# Altium PCB Receiver.PcbDoc (part 1 of 4)
Units mil, origin at the board's own origin, x right, y up, seen from the top; angles counter-clockwise.
Board outline 6370 x 5700 mil, 4 copper layers (Top Layer, GND, VCC, Bottom Layer), stack 23.756 mil thick; 303 components, 262 nets, 1184 pads, 312 vias.
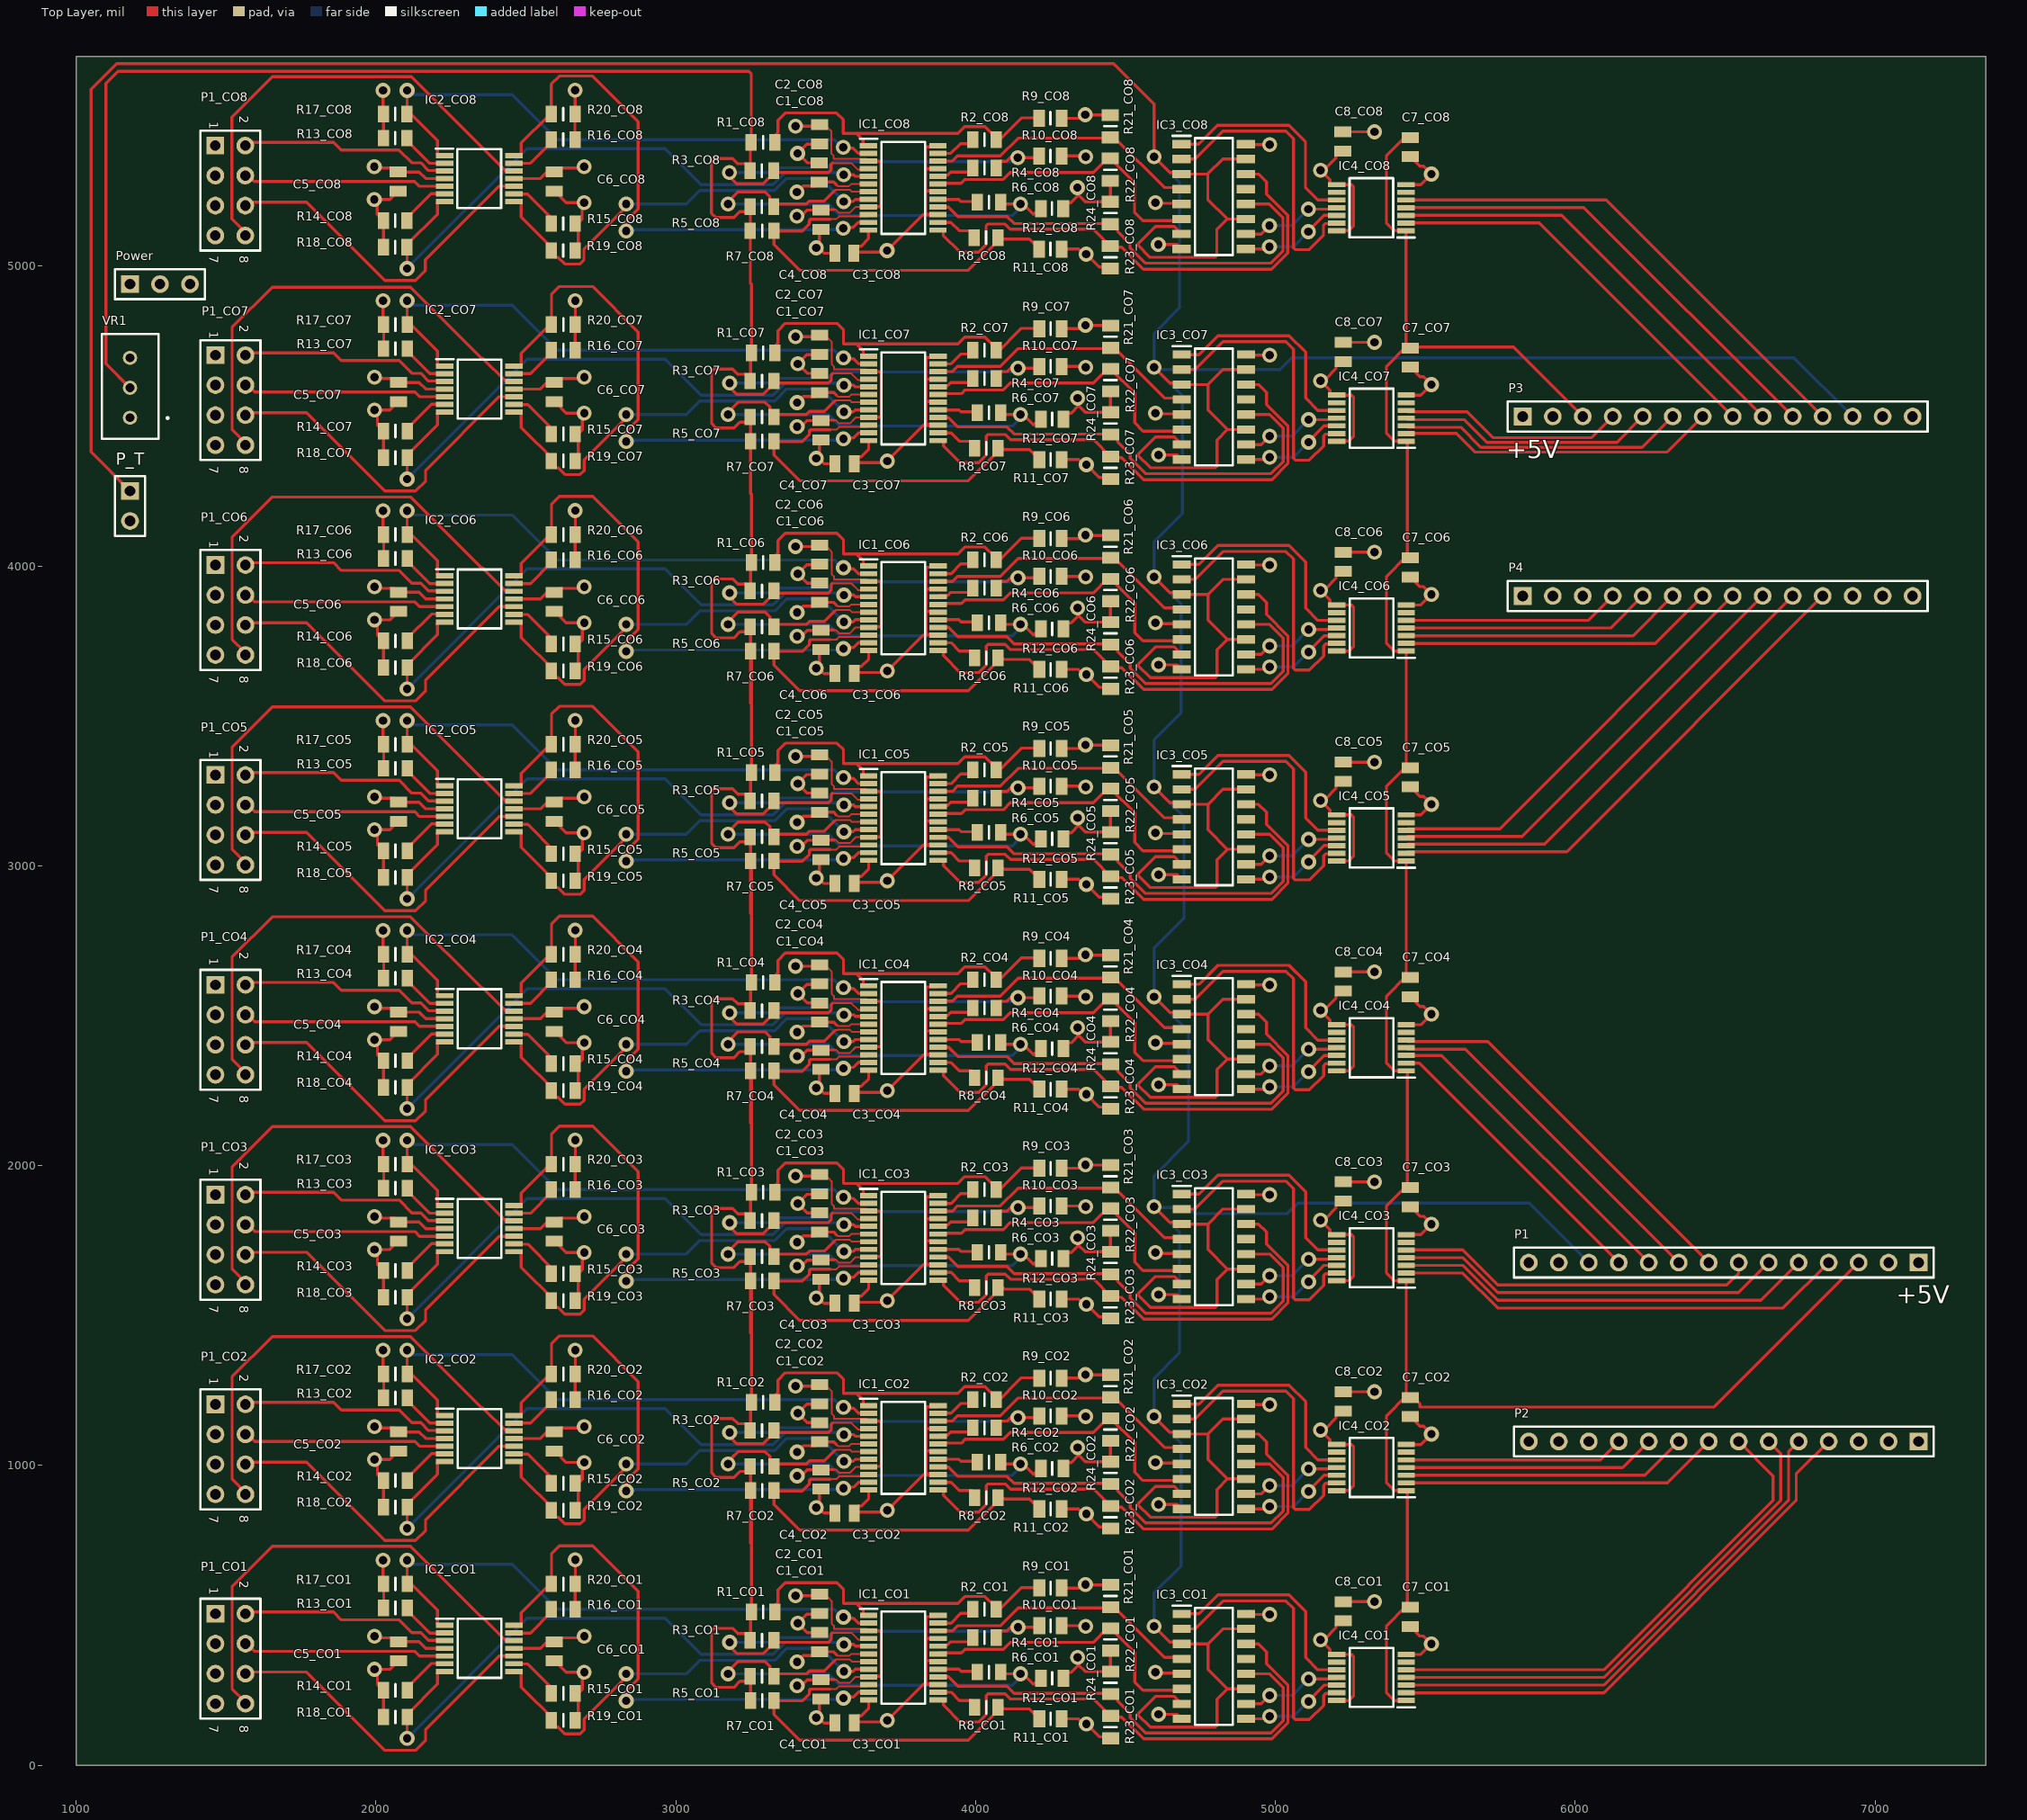
[diagram p0: Top Layer view]
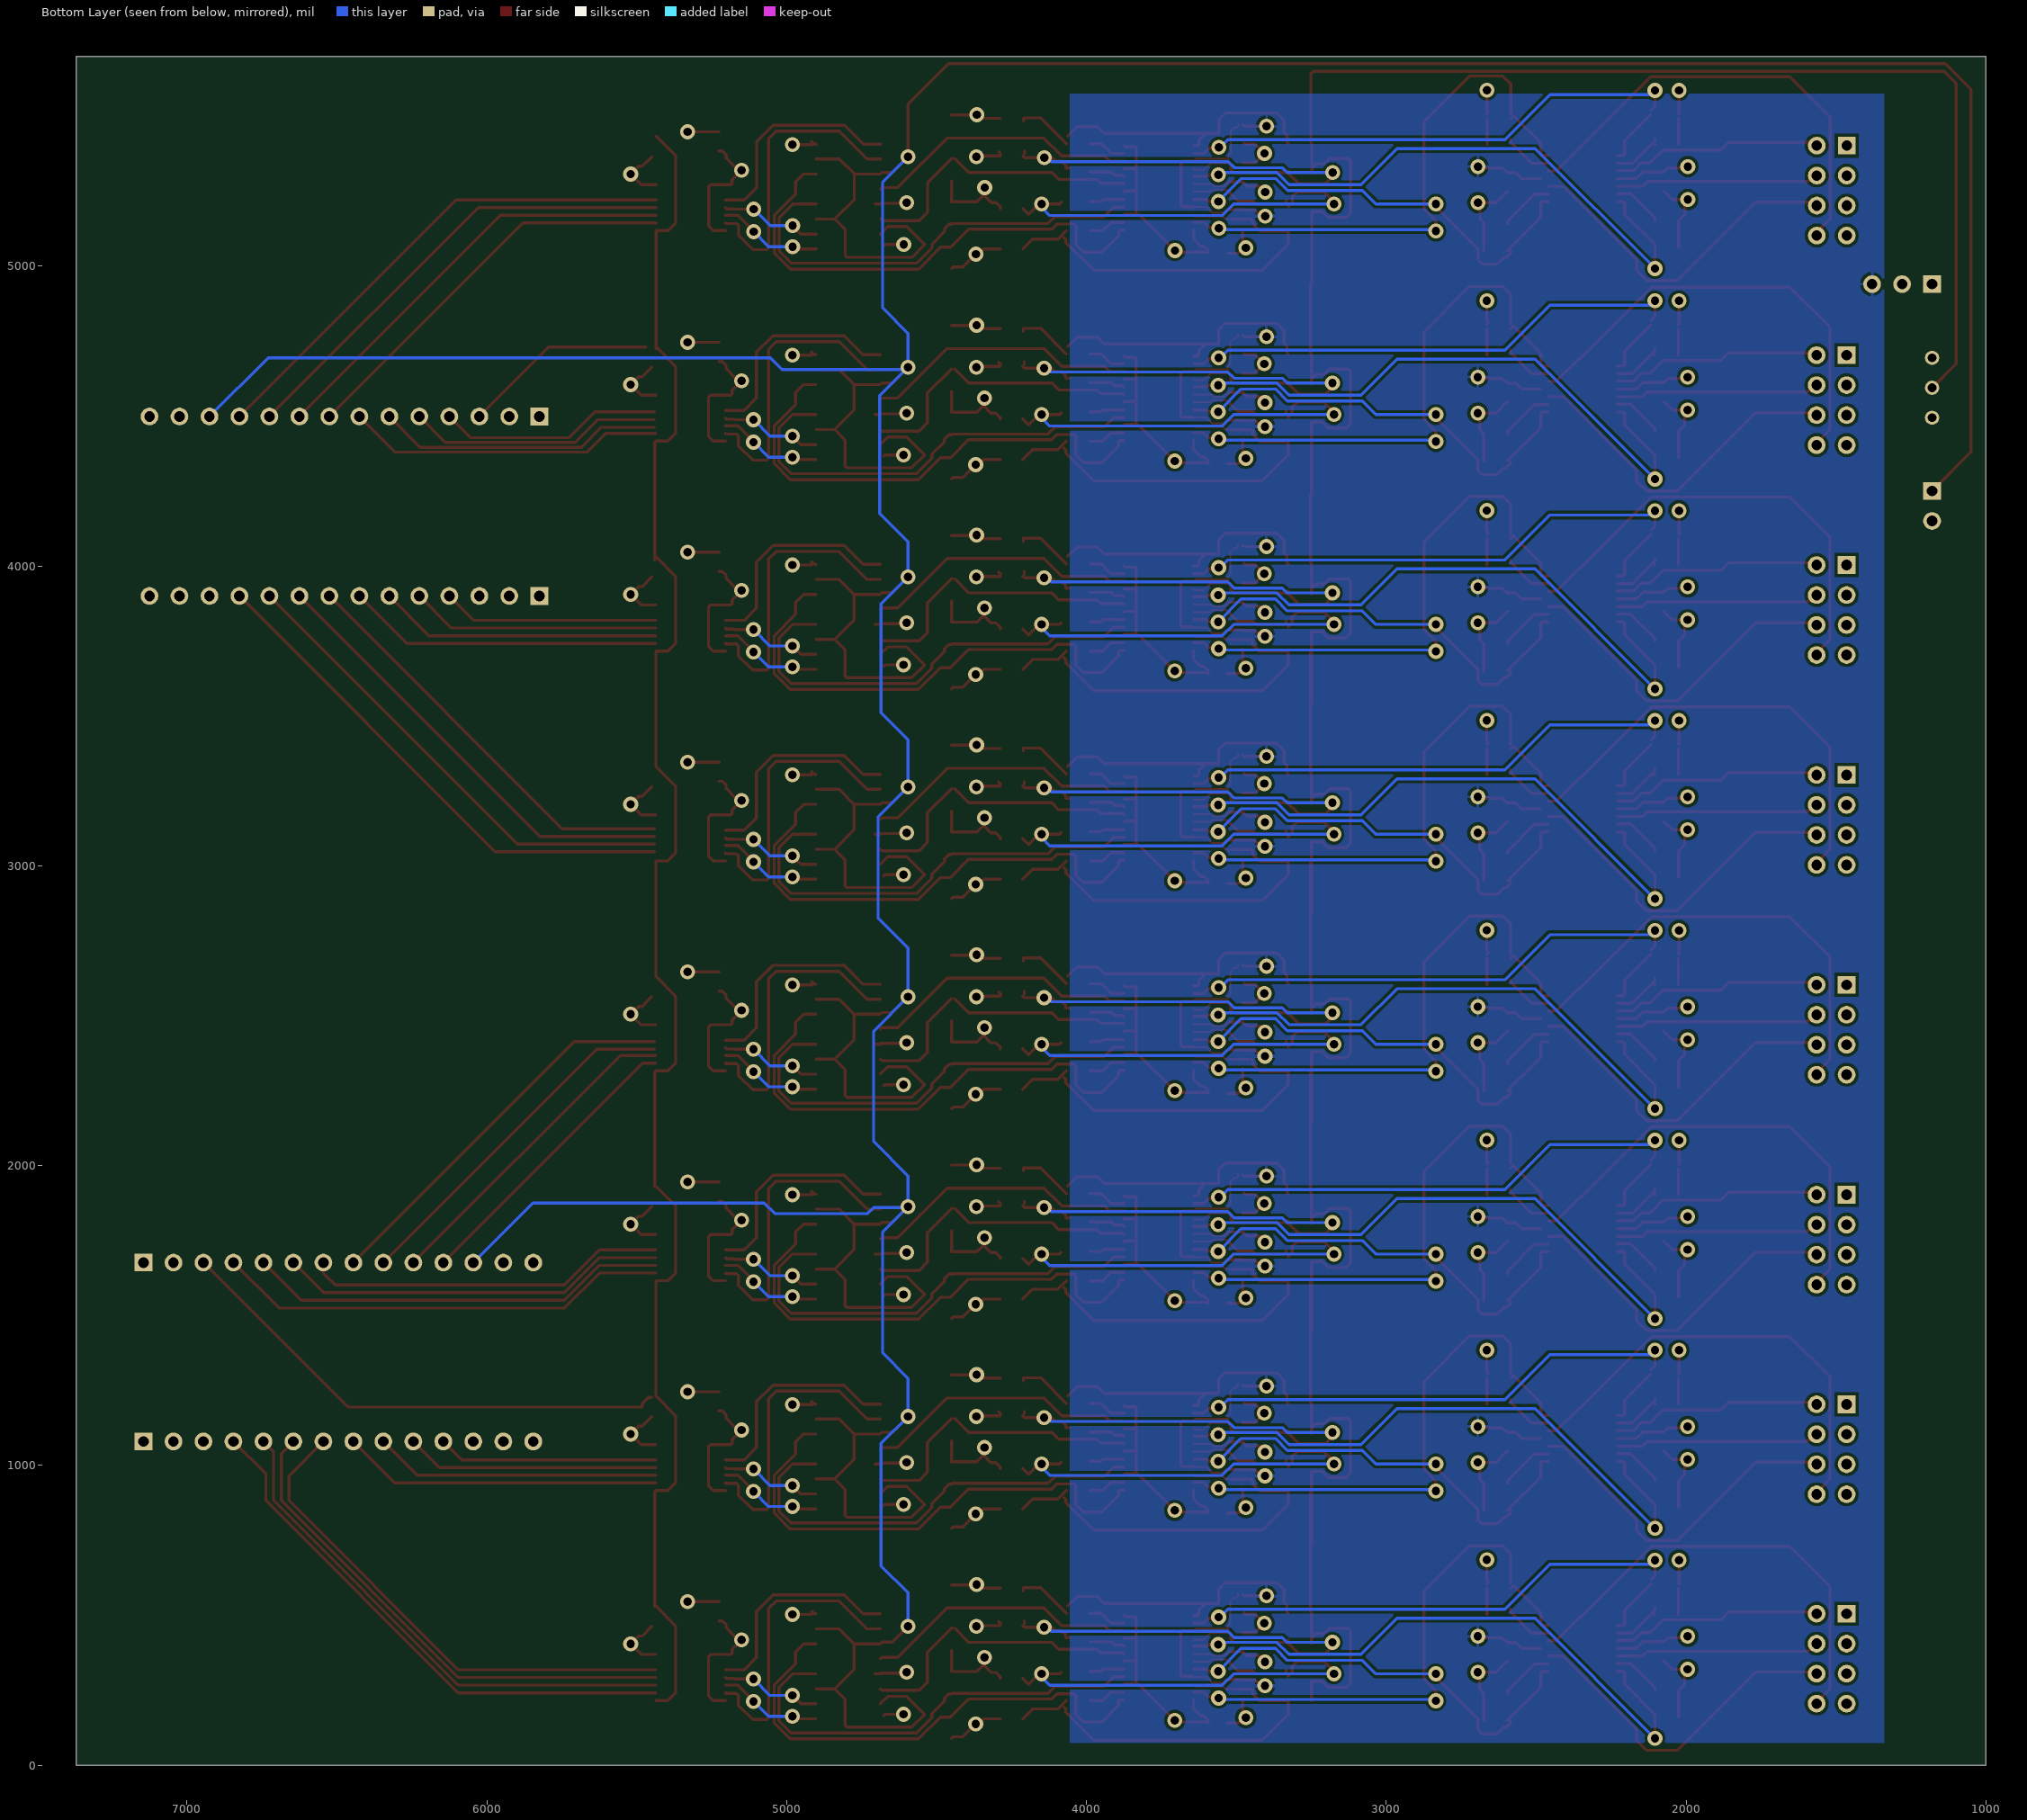
[diagram p1: Bottom Layer view, seen from below]
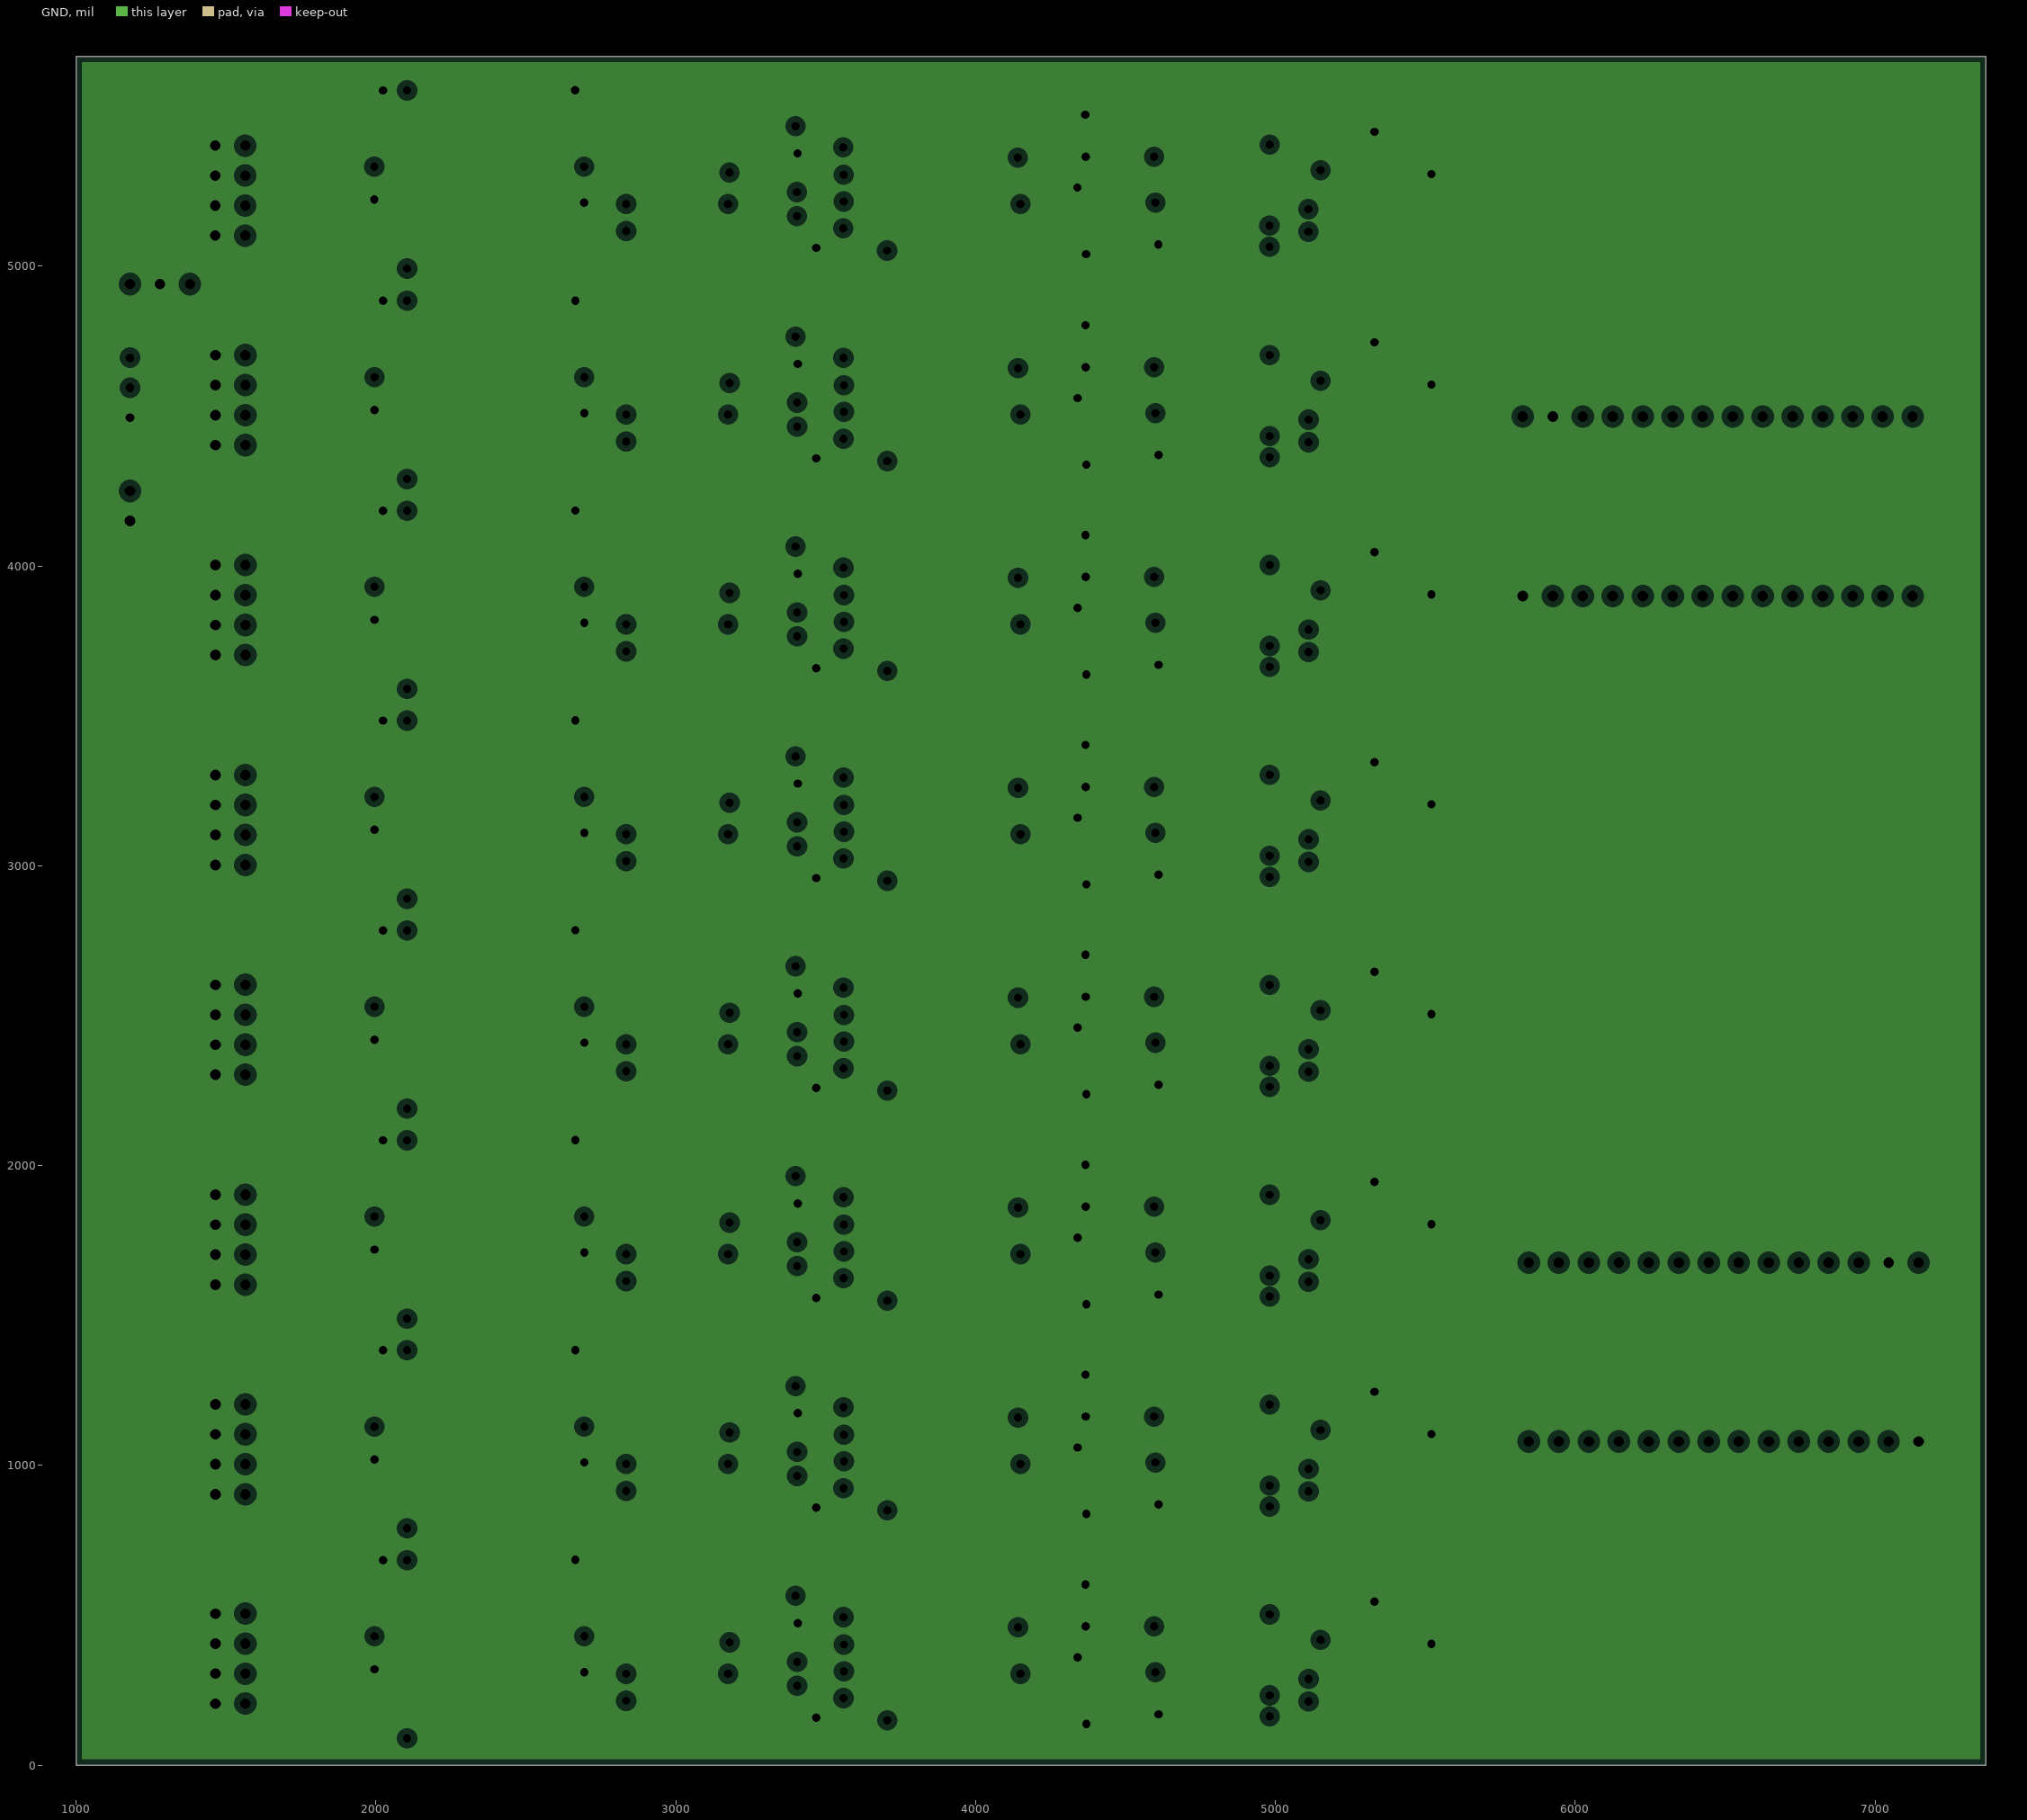
[diagram p2: GND, clearances drawn from the general rule]
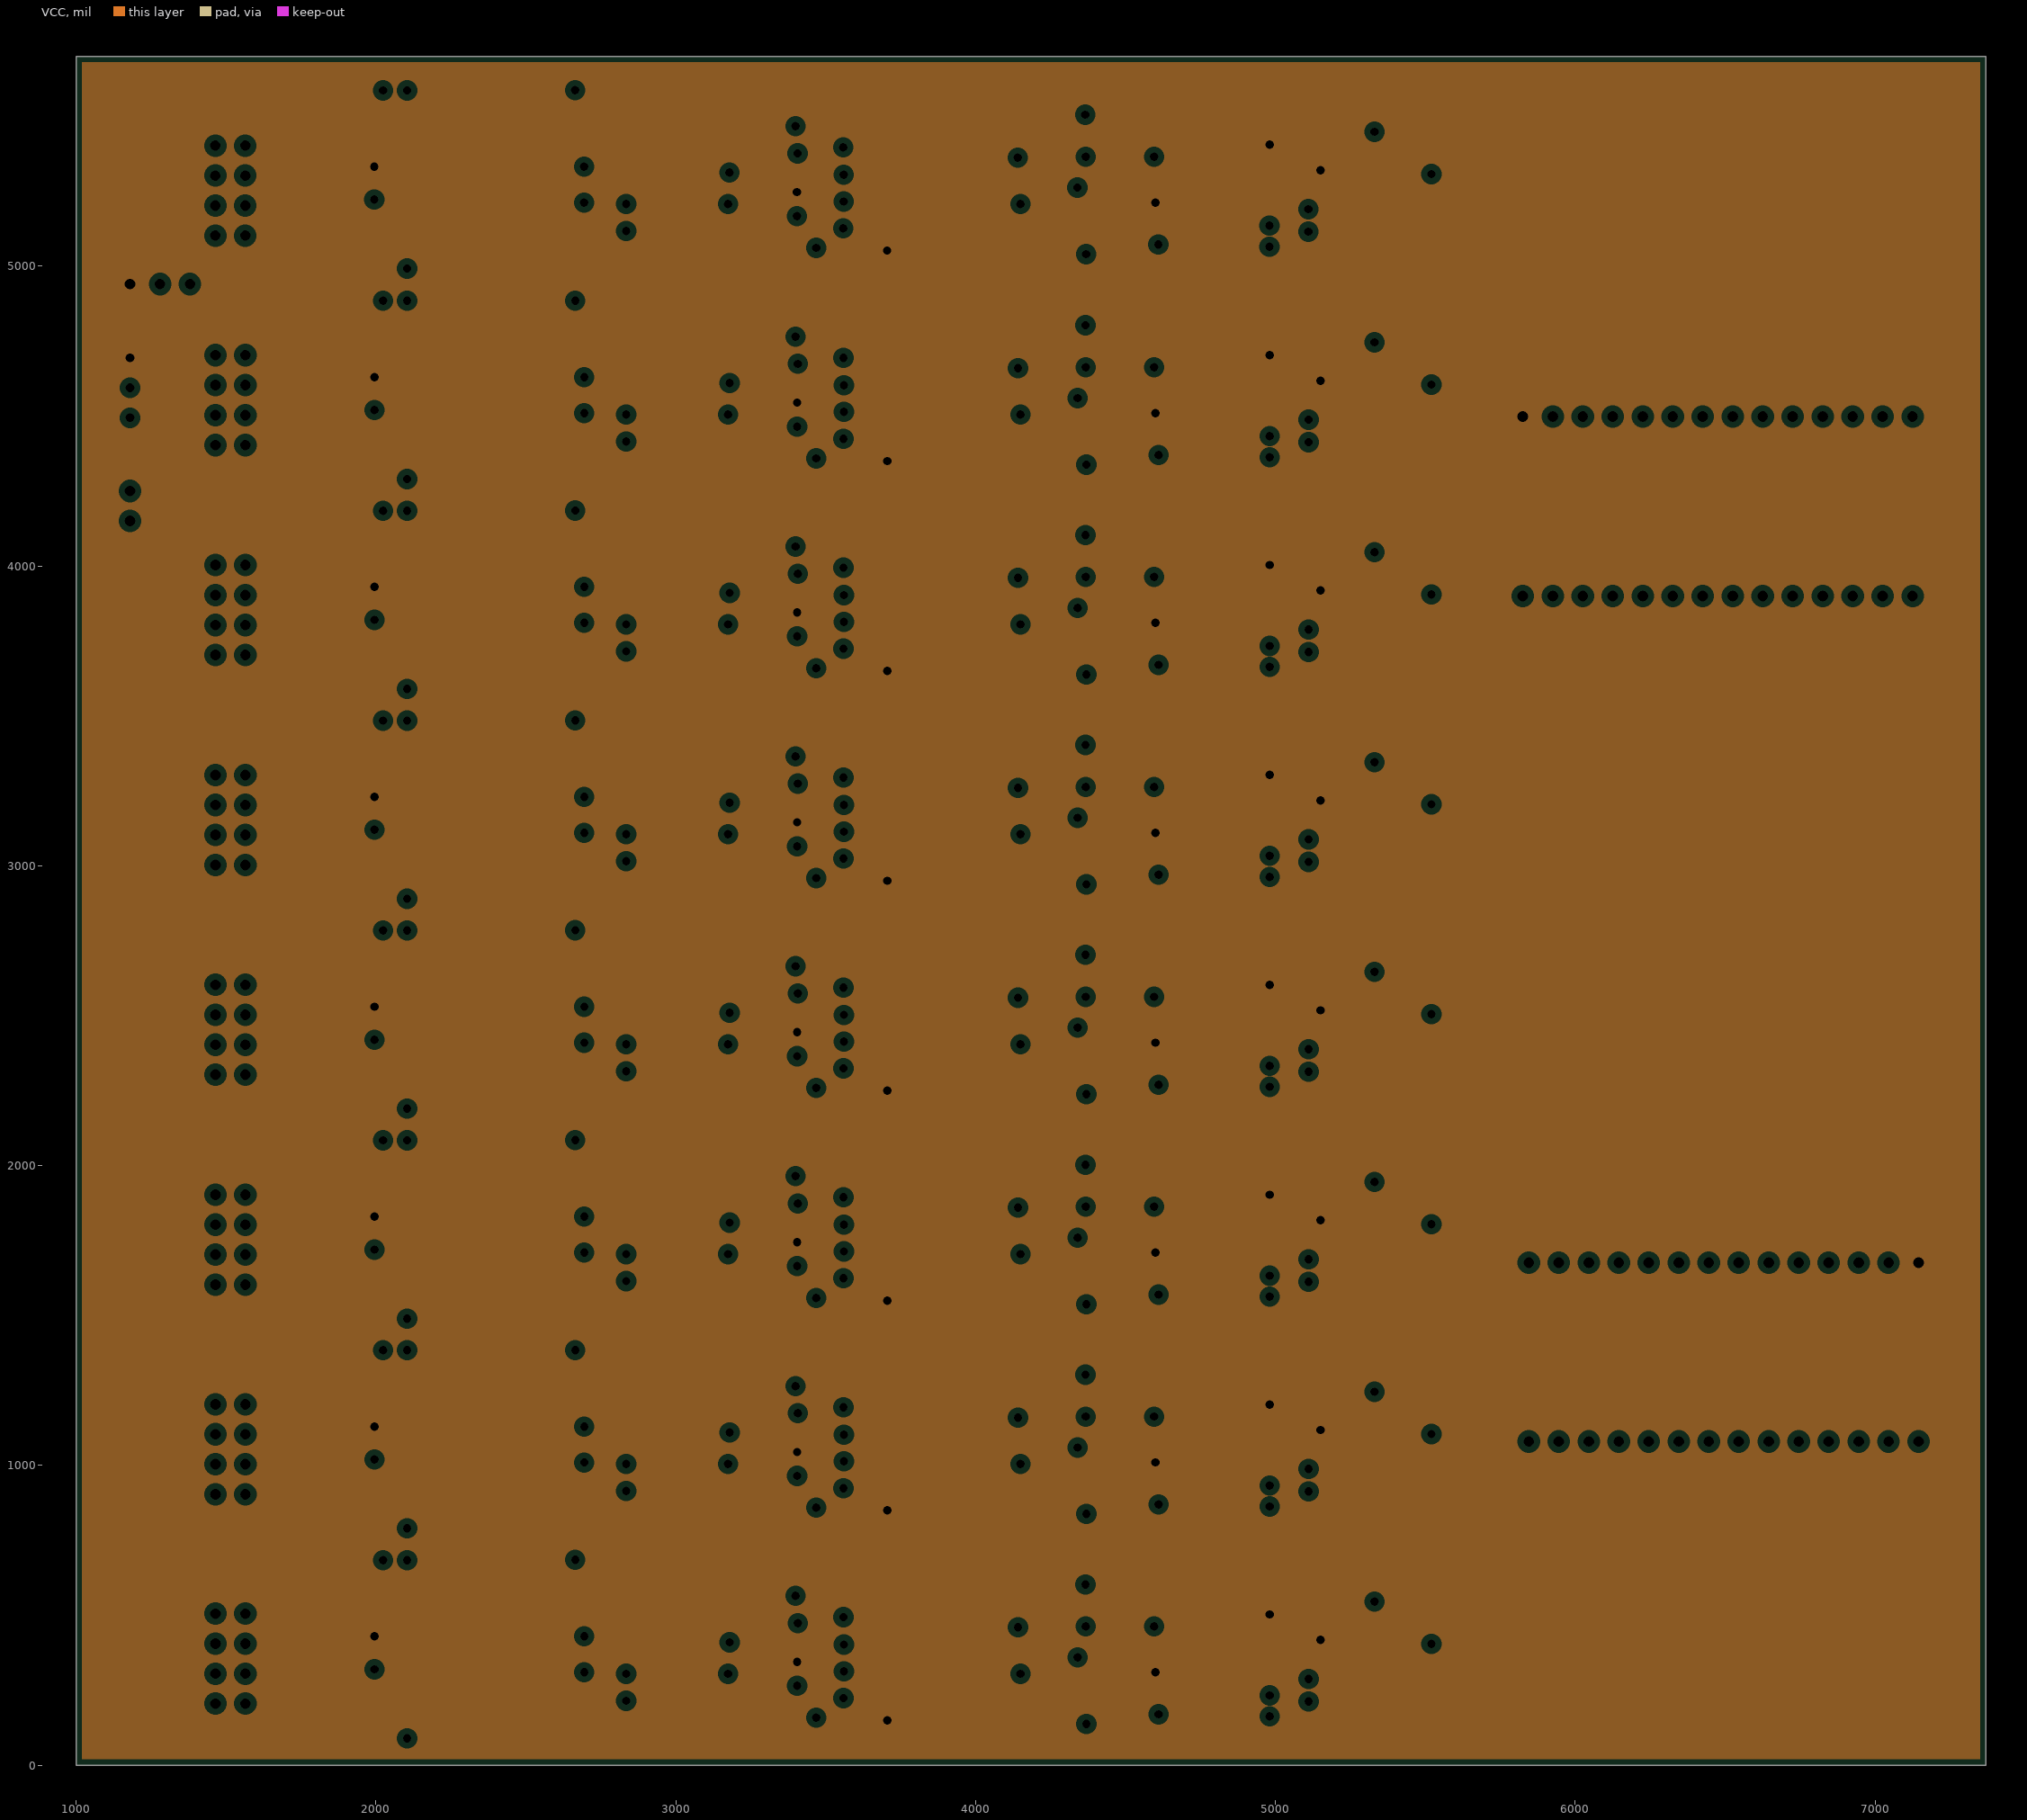
[diagram p3: VCC, clearances drawn from the general rule]
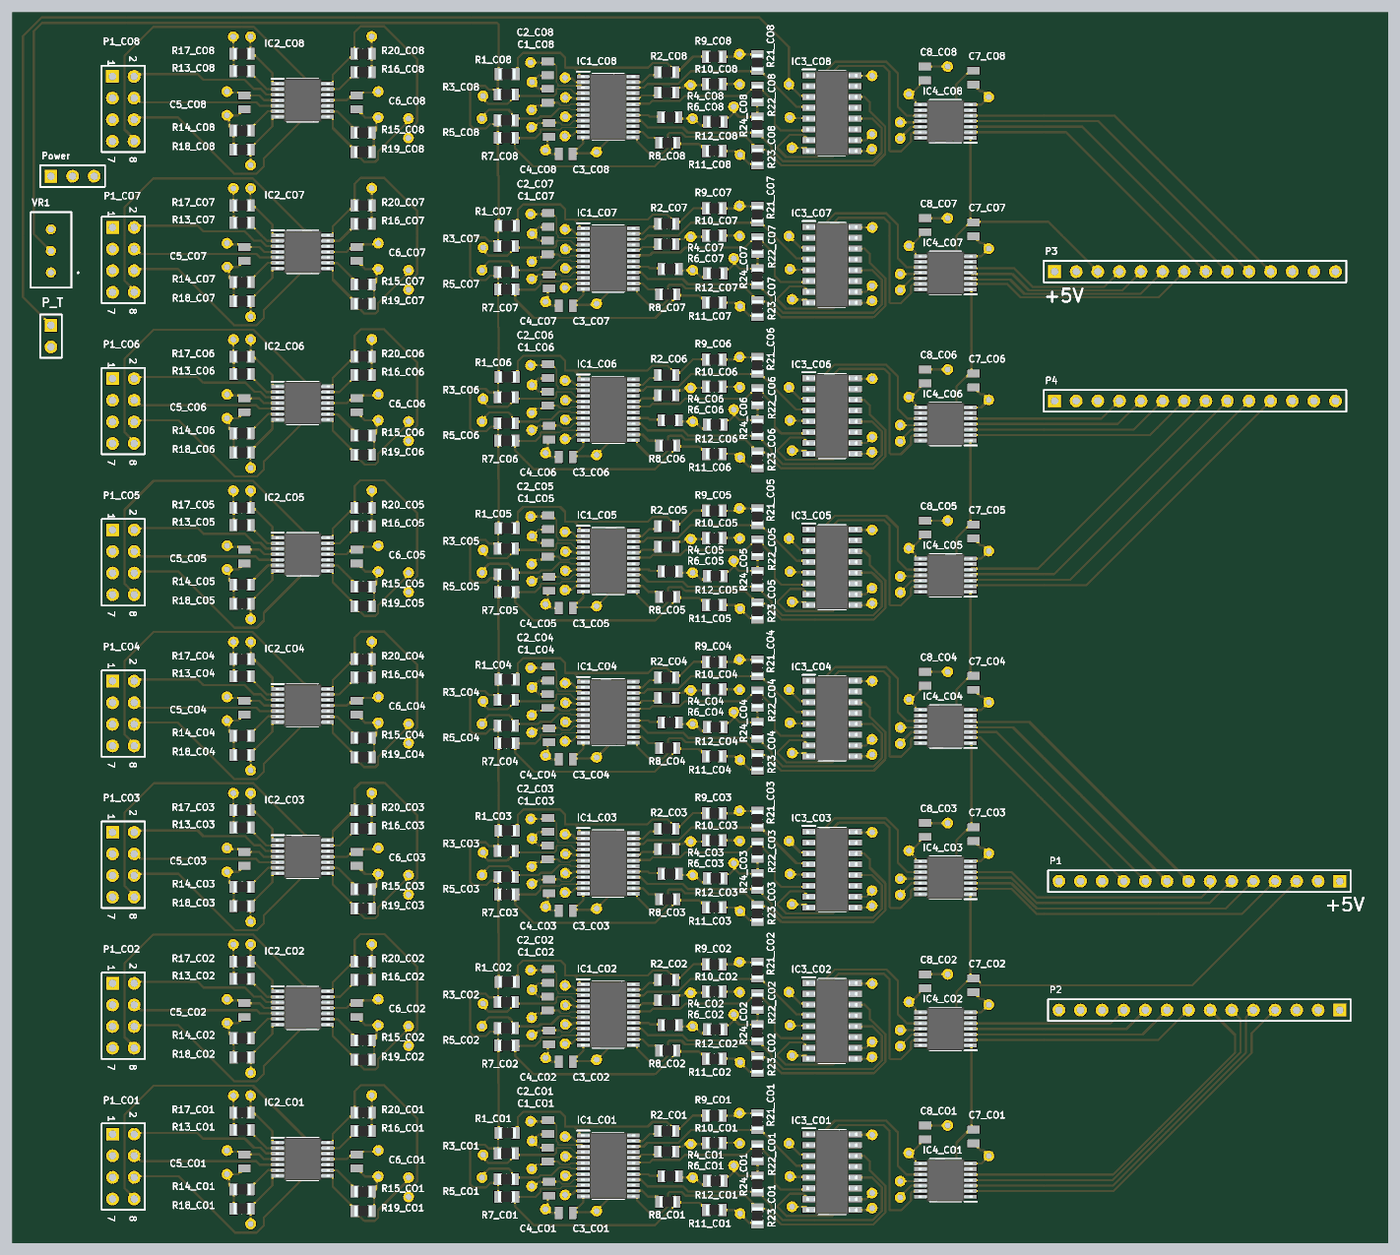
[diagram p7: 3D render of the assembled board from above, using the file's embedded part models]

## Layer stack, top to bottom
Top Solder: solder mask 0.4, Solder Resist, Dk 3.5
Top Layer: signal copper 1.4
Dielectric 2: prepreg 2.8, PP-006, Dk 4.1
GND: plane copper 1.3779, net GND
Dielectric 1: dielectric 12.6, FR-4, Dk 4.8
VCC: plane copper 1.3779, net +5
Dielectric 3: prepreg 2.8, PP-006, Dk 4.1
Bottom Layer: signal copper 1.4
Bottom Solder: solder mask 0.4, Solder Resist, Dk 3.5

## Board outline
1000,0 7370,0 7370,5700 1000,5700

## Design rules (kind name [scope] priority, off if disabled: settings)
Clearance [All] p1: gap=10 ignorepadtopadclearanceinfootprint=FALSE except(0: Arc-Hole Track-Hole SMDPad-Hole THPad-Hole Via-Hole Fill-Hole Poly-Hole Region-Hole Text-Hole; 6: Arc-Arc Arc-Track Arc-SMDPad Track-Track Track-SMDPad SMDPad-SMDPad)
PlaneClearance [All] p1: clearance=20
PlaneConnect [All] p1: planeconnectstyle=Relief reliefexpansion=20 reliefentries=4 reliefconductorwidth=10 reliefairgap=10
PolygonConnect [All] p1: connectstyle=Relief reliefconductorwidth=10 reliefentries=4 polygonreliefangle="90 Angle" airgapwidth=10
RoomDefinition CO8 [InComponentClass('CO8')] p1: confinementstyle=ConfineIn formatcopy=TRUE lockcomponents=FALSE outline 1339.57,4941.97 5610,4941.97 5610,5641.97 1339.57,5641.97
RoomDefinition CO6 [InComponentClass('CO6')] p2: confinementstyle=ConfineIn formatcopy=TRUE lockcomponents=FALSE outline 1340,3540 5610.43,3540 5610.43,4240 1340,4240
RoomDefinition CO5 [InComponentClass('CO5')] p3: confinementstyle=ConfineIn formatcopy=TRUE lockcomponents=FALSE outline 1340,2840 5610.43,2840 5610.43,3540 1340,3540
RoomDefinition CO4 [InComponentClass('CO4')] p4: confinementstyle=ConfineIn formatcopy=TRUE lockcomponents=FALSE outline 1340,2140 5610.43,2140 5610.43,2840 1340,2840
RoomDefinition CO3 [InComponentClass('CO3')] p5: confinementstyle=ConfineIn formatcopy=TRUE lockcomponents=FALSE outline 1340,1440 5610.43,1440 5610.43,2140 1340,2140
RoomDefinition CO2 [InComponentClass('CO2')] p6: confinementstyle=ConfineIn formatcopy=TRUE lockcomponents=FALSE outline 1340,740 5610.43,740 5610.43,1440 1340,1440
RoomDefinition CO1 [InComponentClass('CO1')] p7: confinementstyle=ConfineIn formatcopy=TRUE lockcomponents=FALSE outline 1340,40 5610.43,40 5610.43,740 1340,740
RoomDefinition CO7 [InComponentClass('CO7')] p8: confinementstyle=ConfineIn formatcopy=TRUE lockcomponents=FALSE outline 1340,4240 5610.43,4240 5610.43,4940 1340,4940
RoutingVias [All] p1: holewidth=28 width=50 viastyle="Through Hole" minholewidth=28 minwidth=50 maxholewidth=28 maxwidth=50
SilkToSolderMaskClearance [IsPad] p1: minsilkscreentomaskgap=6 clearancetoexposedcopper=TRUE
SolderMaskExpansion [All] p1: expansion=4
Width [All] p1: maxlimit=10 minlimit=6 preferedwidth=10 minimp=50.000000 maximp=50.000000 favimp=50.000000
27 further rules are at their usual default settings.

## Classes and differential pairs
channel class Comparator: CO1 CO2 CO3 CO4 CO5 CO6 CO7 CO8
component class Receiver: P1 P2 P3 P4 P_T Power VR1
component class CO8: C1_CO8 C2_CO8 C3_CO8 C4_CO8 C5_CO8 C6_CO8 C7_CO8 C8_CO8 IC1_CO8 IC2_CO8 IC3_CO8 IC4_CO8 P1_CO8 R1_CO8 R2_CO8 R3_CO8 R4_CO8 R5_CO8 R6_CO8 R7_CO8 R8_CO8 R9_CO8 R10_CO8 R11_CO8 R12_CO8 R13_CO8 R14_CO8 R15_CO8 R16_CO8 R17_CO8 R18_CO8 R19_CO8 R20_CO8 R21_CO8 R22_CO8 R23_CO8 R24_CO8
component class CO7: C1_CO7 C2_CO7 C3_CO7 C4_CO7 C5_CO7 C6_CO7 C7_CO7 C8_CO7 IC1_CO7 IC2_CO7 IC3_CO7 IC4_CO7 P1_CO7 R1_CO7 R2_CO7 R3_CO7 R4_CO7 R5_CO7 R6_CO7 R7_CO7 R8_CO7 R9_CO7 R10_CO7 R11_CO7 R12_CO7 R13_CO7 R14_CO7 R15_CO7 R16_CO7 R17_CO7 R18_CO7 R19_CO7 R20_CO7 R21_CO7 R22_CO7 R23_CO7 R24_CO7
component class CO6: C1_CO6 C2_CO6 C3_CO6 C4_CO6 C5_CO6 C6_CO6 C7_CO6 C8_CO6 IC1_CO6 IC2_CO6 IC3_CO6 IC4_CO6 P1_CO6 R1_CO6 R2_CO6 R3_CO6 R4_CO6 R5_CO6 R6_CO6 R7_CO6 R8_CO6 R9_CO6 R10_CO6 R11_CO6 R12_CO6 R13_CO6 R14_CO6 R15_CO6 R16_CO6 R17_CO6 R18_CO6 R19_CO6 R20_CO6 R21_CO6 R22_CO6 R23_CO6 R24_CO6
component class CO5: C1_CO5 C2_CO5 C3_CO5 C4_CO5 C5_CO5 C6_CO5 C7_CO5 C8_CO5 IC1_CO5 IC2_CO5 IC3_CO5 IC4_CO5 P1_CO5 R1_CO5 R2_CO5 R3_CO5 R4_CO5 R5_CO5 R6_CO5 R7_CO5 R8_CO5 R9_CO5 R10_CO5 R11_CO5 R12_CO5 R13_CO5 R14_CO5 R15_CO5 R16_CO5 R17_CO5 R18_CO5 R19_CO5 R20_CO5 R21_CO5 R22_CO5 R23_CO5 R24_CO5
component class CO4: C1_CO4 C2_CO4 C3_CO4 C4_CO4 C5_CO4 C6_CO4 C7_CO4 C8_CO4 IC1_CO4 IC2_CO4 IC3_CO4 IC4_CO4 P1_CO4 R1_CO4 R2_CO4 R3_CO4 R4_CO4 R5_CO4 R6_CO4 R7_CO4 R8_CO4 R9_CO4 R10_CO4 R11_CO4 R12_CO4 R13_CO4 R14_CO4 R15_CO4 R16_CO4 R17_CO4 R18_CO4 R19_CO4 R20_CO4 R21_CO4 R22_CO4 R23_CO4 R24_CO4
component class CO3: C1_CO3 C2_CO3 C3_CO3 C4_CO3 C5_CO3 C6_CO3 C7_CO3 C8_CO3 IC1_CO3 IC2_CO3 IC3_CO3 IC4_CO3 P1_CO3 R1_CO3 R2_CO3 R3_CO3 R4_CO3 R5_CO3 R6_CO3 R7_CO3 R8_CO3 R9_CO3 R10_CO3 R11_CO3 R12_CO3 R13_CO3 R14_CO3 R15_CO3 R16_CO3 R17_CO3 R18_CO3 R19_CO3 R20_CO3 R21_CO3 R22_CO3 R23_CO3 R24_CO3
component class CO2: C1_CO2 C2_CO2 C3_CO2 C4_CO2 C5_CO2 C6_CO2 C7_CO2 C8_CO2 IC1_CO2 IC2_CO2 IC3_CO2 IC4_CO2 P1_CO2 R1_CO2 R2_CO2 R3_CO2 R4_CO2 R5_CO2 R6_CO2 R7_CO2 R8_CO2 R9_CO2 R10_CO2 R11_CO2 R12_CO2 R13_CO2 R14_CO2 R15_CO2 R16_CO2 R17_CO2 R18_CO2 R19_CO2 R20_CO2 R21_CO2 R22_CO2 R23_CO2 R24_CO2
component class CO1: C1_CO1 C2_CO1 C3_CO1 C4_CO1 C5_CO1 C6_CO1 C7_CO1 C8_CO1 IC1_CO1 IC2_CO1 IC3_CO1 IC4_CO1 P1_CO1 R1_CO1 R2_CO1 R3_CO1 R4_CO1 R5_CO1 R6_CO1 R7_CO1 R8_CO1 R9_CO1 R10_CO1 R11_CO1 R12_CO1 R13_CO1 R14_CO1 R15_CO1 R16_CO1 R17_CO1 R18_CO1 R19_CO1 R20_CO1 R21_CO1 R22_CO1 R23_CO1 R24_CO1

## Components (designator, comment, footprint, x,y, rotation, side; value= is the part's Value field where it differs from the comment)
C1_CO1 "CC0805ZRY5V9BB104" CAPC2013X70N 3479.2,410.57 r270 top (schematic designator C1)
C1_CO2 "CC0805ZRY5V9BB104" CAPC2013X70N 3479.2,1110.57 r270 top (schematic designator C1)
C1_CO3 "CC0805ZRY5V9BB104" CAPC2013X70N 3479.2,1810.57 r270 top (schematic designator C1)
C1_CO4 "CC0805ZRY5V9BB104" CAPC2013X70N 3479.2,2510.57 r270 top (schematic designator C1)
C1_CO5 "CC0805ZRY5V9BB104" CAPC2013X70N 3479.2,3210.57 r270 top (schematic designator C1)
C1_CO6 "CC0805ZRY5V9BB104" CAPC2013X70N 3479.2,3910.57 r270 top (schematic designator C1)
C1_CO7 "CC0805ZRY5V9BB104" CAPC2013X70N 3479.2,4610.57 r270 top (schematic designator C1)
C1_CO8 "CC0805ZRY5V9BB104" CAPC2013X70N 3478.77,5312.54 r270 top (schematic designator C1)
C2_CO1 "CC0805ZRY5V9BB104" CAPC2013X70N 3480,538 r90 top (schematic designator C2)
C2_CO2 "CC0805ZRY5V9BB104" CAPC2013X70N 3480,1238 r90 top (schematic designator C2)
C2_CO3 "CC0805ZRY5V9BB104" CAPC2013X70N 3480,1938 r90 top (schematic designator C2)
C2_CO4 "CC0805ZRY5V9BB104" CAPC2013X70N 3480,2638 r90 top (schematic designator C2)
C2_CO5 "CC0805ZRY5V9BB104" CAPC2013X70N 3480,3338 r90 top (schematic designator C2)
C2_CO6 "CC0805ZRY5V9BB104" CAPC2013X70N 3480,4038 r90 top (schematic designator C2)
C2_CO7 "CC0805ZRY5V9BB104" CAPC2013X70N 3480,4738 r90 top (schematic designator C2)
C2_CO8 "CC0805ZRY5V9BB104" CAPC2013X70N 3479.57,5439.97 r90 top (schematic designator C2)
C3_CO1 "CC0805ZRY5V9BB104" CAPC2013X70N 3562.87,140.99 r0 top (schematic designator C3)
C3_CO2 "CC0805ZRY5V9BB104" CAPC2013X70N 3562.87,840.99 r0 top (schematic designator C3)
C3_CO3 "CC0805ZRY5V9BB104" CAPC2013X70N 3562.87,1540.99 r0 top (schematic designator C3)
C3_CO4 "CC0805ZRY5V9BB104" CAPC2013X70N 3562.87,2240.99 r0 top (schematic designator C3)
C3_CO5 "CC0805ZRY5V9BB104" CAPC2013X70N 3562.87,2940.99 r0 top (schematic designator C3)
C3_CO6 "CC0805ZRY5V9BB104" CAPC2013X70N 3562.87,3640.99 r0 top (schematic designator C3)
C3_CO7 "CC0805ZRY5V9BB104" CAPC2013X70N 3562.87,4340.99 r0 top (schematic designator C3)
C3_CO8 "CC0805ZRY5V9BB104" CAPC2013X70N 3562.44,5042.96 r0 top (schematic designator C3)
C4_CO1 "CC0805ZRY5V9BB104" CAPC2013X70N 3485,253 r90 top (schematic designator C4)
C4_CO2 "CC0805ZRY5V9BB104" CAPC2013X70N 3485,953 r90 top (schematic designator C4)
C4_CO3 "CC0805ZRY5V9BB104" CAPC2013X70N 3485,1653 r90 top (schematic designator C4)
C4_CO4 "CC0805ZRY5V9BB104" CAPC2013X70N 3485,2353 r90 top (schematic designator C4)
C4_CO5 "CC0805ZRY5V9BB104" CAPC2013X70N 3485,3053 r90 top (schematic designator C4)
C4_CO6 "CC0805ZRY5V9BB104" CAPC2013X70N 3485,3753 r90 top (schematic designator C4)
C4_CO7 "CC0805ZRY5V9BB104" CAPC2013X70N 3485,4453 r90 top (schematic designator C4)
C4_CO8 "CC0805ZRY5V9BB104" CAPC2013X70N 3484.57,5154.97 r90 top (schematic designator C4)
C5_CO1 "CC0805ZRY5V9BB104" CAPC2013X70N 2075,380 r270 top (schematic designator C5)
C5_CO2 "CC0805ZRY5V9BB104" CAPC2013X70N 2075,1080 r270 top (schematic designator C5)
C5_CO3 "CC0805ZRY5V9BB104" CAPC2013X70N 2075,1780 r270 top (schematic designator C5)
C5_CO4 "CC0805ZRY5V9BB104" CAPC2013X70N 2075,2480 r270 top (schematic designator C5)
C5_CO5 "CC0805ZRY5V9BB104" CAPC2013X70N 2075,3180 r270 top (schematic designator C5)
C5_CO6 "CC0805ZRY5V9BB104" CAPC2013X70N 2075,3880 r270 top (schematic designator C5)
C5_CO7 "CC0805ZRY5V9BB104" CAPC2013X70N 2075,4580 r270 top (schematic designator C5)
C5_CO8 "CC0805ZRY5V9BB104" CAPC2013X70N 2074.57,5281.97 r270 top (schematic designator C5)
C6_CO1 "CC0805ZRY5V9BB104" CAPC2013X70N 2595,380 r270 top (schematic designator C6)
C6_CO2 "CC0805ZRY5V9BB104" CAPC2013X70N 2595,1080 r270 top (schematic designator C6)
C6_CO3 "CC0805ZRY5V9BB104" CAPC2013X70N 2595,1780 r270 top (schematic designator C6)
C6_CO4 "CC0805ZRY5V9BB104" CAPC2013X70N 2595,2480 r270 top (schematic designator C6)
C6_CO5 "CC0805ZRY5V9BB104" CAPC2013X70N 2595,3180 r270 top (schematic designator C6)
C6_CO6 "CC0805ZRY5V9BB104" CAPC2013X70N 2595,3880 r270 top (schematic designator C6)
C6_CO7 "CC0805ZRY5V9BB104" CAPC2013X70N 2595,4580 r270 top (schematic designator C6)
C6_CO8 "CC0805ZRY5V9BB104" CAPC2013X70N 2594.57,5281.97 r270 top (schematic designator C6)
C7_CO1 "CC0805ZRY5V9BB104" CAPC2013X70N 5450,495.03 r270 top (schematic designator C7)
C7_CO2 "CC0805ZRY5V9BB104" CAPC2013X70N 5450,1195.03 r270 top (schematic designator C7)
C7_CO3 "CC0805ZRY5V9BB104" CAPC2013X70N 5450,1895.03 r270 top (schematic designator C7)
C7_CO4 "CC0805ZRY5V9BB104" CAPC2013X70N 5450,2595.03 r270 top (schematic designator C7)
C7_CO5 "CC0805ZRY5V9BB104" CAPC2013X70N 5450,3295.03 r270 top (schematic designator C7)
C7_CO6 "CC0805ZRY5V9BB104" CAPC2013X70N 5450,3995.03 r270 top (schematic designator C7)
C7_CO7 "CC0805ZRY5V9BB104" CAPC2013X70N 5450,4695.03 r270 top (schematic designator C7)
C7_CO8 "CC0805ZRY5V9BB104" CAPC2013X70N 5449.57,5397 r270 top (schematic designator C7)
C8_CO1 "a" CAPC2013X70N 5225.43,513.78 r90 top (schematic designator C8)
C8_CO2 "a" CAPC2013X70N 5225.43,1213.78 r90 top (schematic designator C8)
C8_CO3 "a" CAPC2013X70N 5225.43,1913.78 r90 top (schematic designator C8)
C8_CO4 "a" CAPC2013X70N 5225.43,2613.78 r90 top (schematic designator C8)
C8_CO5 "a" CAPC2013X70N 5225.43,3313.78 r90 top (schematic designator C8)
C8_CO6 "a" CAPC2013X70N 5225.43,4013.78 r90 top (schematic designator C8)
C8_CO7 "a" CAPC2013X70N 5225.43,4713.78 r90 top (schematic designator C8)
C8_CO8 "a" CAPC2013X70N 5225,5415.75 r90 top (schematic designator C8)
IC1_CO1 "MAX9602EUG+" SOP65P640X110-24N 3759.2,358.95 r0 top (schematic designator IC1)
IC1_CO2 "MAX9602EUG+" SOP65P640X110-24N 3759.2,1058.95 r0 top (schematic designator IC1)
IC1_CO3 "MAX9602EUG+" SOP65P640X110-24N 3759.2,1758.95 r0 top (schematic designator IC1)
IC1_CO4 "MAX9602EUG+" SOP65P640X110-24N 3759.2,2458.95 r0 top (schematic designator IC1)
IC1_CO5 "MAX9602EUG+" SOP65P640X110-24N 3759.2,3158.95 r0 top (schematic designator IC1)
IC1_CO6 "MAX9602EUG+" SOP65P640X110-24N 3759.2,3858.95 r0 top (schematic designator IC1)
IC1_CO7 "MAX9602EUG+" SOP65P640X110-24N 3759.2,4558.95 r0 top (schematic designator IC1)
IC1_CO8 "MAX9602EUG+" SOP65P640X110-24N 3758.77,5260.92 r0 top (schematic designator IC1)
IC2_CO1 "OPA4727AIPWRG4" SOP65P640X120-14N 2345.24,390 r0 top (schematic designator IC2)
IC2_CO2 "OPA4727AIPWRG4" SOP65P640X120-14N 2345.24,1090 r0 top (schematic designator IC2)
IC2_CO3 "OPA4727AIPWRG4" SOP65P640X120-14N 2345.24,1790 r0 top (schematic designator IC2)
IC2_CO4 "OPA4727AIPWRG4" SOP65P640X120-14N 2345.24,2490 r0 top (schematic designator IC2)
IC2_CO5 "OPA4727AIPWRG4" SOP65P640X120-14N 2345.24,3190 r0 top (schematic designator IC2)
IC2_CO6 "OPA4727AIPWRG4" SOP65P640X120-14N 2345.24,3890 r0 top (schematic designator IC2)
IC2_CO7 "OPA4727AIPWRG4" SOP65P640X120-14N 2345.24,4590 r0 top (schematic designator IC2)
IC2_CO8 "OPA4727AIPWRG4" SOP65P640X120-14N 2344.8,5291.97 r0 top (schematic designator IC2)
IC3_CO1 "CD4043BDR" SOIC127P600X175-16N 4794.87,330 r0 top (schematic designator IC3)
IC3_CO2 "CD4043BDR" SOIC127P600X175-16N 4794.87,1030 r0 top (schematic designator IC3)
IC3_CO3 "CD4043BDR" SOIC127P600X175-16N 4794.87,1730 r0 top (schematic designator IC3)
IC3_CO4 "CD4043BDR" SOIC127P600X175-16N 4794.87,2430 r0 top (schematic designator IC3)
IC3_CO5 "CD4043BDR" SOIC127P600X175-16N 4794.87,3130 r0 top (schematic designator IC3)
IC3_CO6 "CD4043BDR" SOIC127P600X175-16N 4794.87,3830 r0 top (schematic designator IC3)
IC3_CO7 "CD4043BDR" SOIC127P600X175-16N 4794.87,4530 r0 top (schematic designator IC3)
IC3_CO8 "CD4043BDR" SOIC127P600X175-16N 4794.44,5231.97 r0 top (schematic designator IC3)
IC4_CO1 "ADG3304BRUZ-REEL7" SOP65P640X120-14N 5320.43,293.03 r180 top (schematic designator IC4)
IC4_CO2 "ADG3304BRUZ-REEL7" SOP65P640X120-14N 5320.43,993.03 r180 top (schematic designator IC4)
IC4_CO3 "ADG3304BRUZ-REEL7" SOP65P640X120-14N 5320.43,1693.03 r180 top (schematic designator IC4)
IC4_CO4 "ADG3304BRUZ-REEL7" SOP65P640X120-14N 5320.43,2393.03 r180 top (schematic designator IC4)
IC4_CO5 "ADG3304BRUZ-REEL7" SOP65P640X120-14N 5320.43,3093.03 r180 top (schematic designator IC4)
IC4_CO6 "ADG3304BRUZ-REEL7" SOP65P640X120-14N 5320.43,3793.03 r180 top (schematic designator IC4)
IC4_CO7 "ADG3304BRUZ-REEL7" SOP65P640X120-14N 5320.43,4493.03 r180 top (schematic designator IC4)
IC4_CO8 "ADG3304BRUZ-REEL7" SOP65P640X120-14N 5320,5195 r180 top (schematic designator IC4)
P1 "Header 14" HDR1X14 7145,1676.75 r180 top
P1_CO1 "Header 4X2" HDR2X4 1465,505.63 r270 top (schematic designator P1)
P1_CO2 "Header 4X2" HDR2X4 1465,1203.99 r270 top (schematic designator P1)
P1_CO3 "Header 4X2" HDR2X4 1465,1903.03 r270 top (schematic designator P1)
P1_CO4 "Header 4X2" HDR2X4 1465,2603.03 r270 top (schematic designator P1)
P1_CO5 "Header 4X2" HDR2X4 1465,3303.03 r270 top (schematic designator P1)
P1_CO6 "Header 4X2" HDR2X4 1465,4003.03 r270 top (schematic designator P1)
P1_CO7 "Header 4X2" HDR2X4 1465,4703.03 r270 top (schematic designator P1)
P1_CO8 "Header 4X2" HDR2X4 1464.57,5401.97 r270 top (schematic designator P1)
P2 "Header 14" HDR1X14 7145,1080 r180 top
P3 "Header 14" HDR1X14 5825,4498.57 r0 top
P4 "Header 14" HDR1X14 5825,3900 r0 top
P_T "Header 2" HDR1X2 1180,4250 r270 top
Power "Header 3" HDR1X3 1180,4940 r0 top
R1_CO1 "RC0805JR-071KL" RESC2012X60N 3291.53,510.96 r0 top (schematic designator R1)
R1_CO2 "RC0805JR-071KL" RESC2012X60N 3291.53,1210.96 r0 top (schematic designator R1)
R1_CO3 "RC0805JR-071KL" RESC2012X60N 3291.53,1910.96 r0 top (schematic designator R1)
R1_CO4 "RC0805JR-071KL" RESC2012X60N 3291.53,2610.96 r0 top (schematic designator R1)
R1_CO5 "RC0805JR-071KL" RESC2012X60N 3291.53,3310.96 r0 top (schematic designator R1)
R1_CO6 "RC0805JR-071KL" RESC2012X60N 3291.53,4010.96 r0 top (schematic designator R1)
R1_CO7 "RC0805JR-071KL" RESC2012X60N 3291.53,4710.96 r0 top (schematic designator R1)
R1_CO8 "RC0805JR-071KL" RESC2012X60N 3291.09,5412.93 r0 top (schematic designator R1)
R2_CO1 "RT0805BRD0724K9L" RESC2012X60N 4030,520 r0 top (schematic designator R2)
R2_CO2 "RT0805BRD0724K9L" RESC2012X60N 4030,1220 r0 top (schematic designator R2)
R2_CO3 "RT0805BRD0724K9L" RESC2012X60N 4030,1920 r0 top (schematic designator R2)
R2_CO4 "RT0805BRD0724K9L" RESC2012X60N 4030,2620 r0 top (schematic designator R2)
R2_CO5 "RT0805BRD0724K9L" RESC2012X60N 4030,3320 r0 top (schematic designator R2)
R2_CO6 "RT0805BRD0724K9L" RESC2012X60N 4030,4020 r0 top (schematic designator R2)
R2_CO7 "RT0805BRD0724K9L" RESC2012X60N 4030,4720 r0 top (schematic designator R2)
R2_CO8 "RT0805BRD0724K9L" RESC2012X60N 4029.57,5421.97 r0 top (schematic designator R2)
R3_CO1 "RC0805JR-071KL" RESC2012X60N 3287.97,416.75 r0 top (schematic designator R3)
R3_CO2 "RC0805JR-071KL" RESC2012X60N 3287.97,1116.75 r0 top (schematic designator R3)
R3_CO3 "RC0805JR-071KL" RESC2012X60N 3287.97,1816.75 r0 top (schematic designator R3)
R3_CO4 "RC0805JR-071KL" RESC2012X60N 3287.97,2516.75 r0 top (schematic designator R3)
R3_CO5 "RC0805JR-071KL" RESC2012X60N 3287.97,3216.75 r0 top (schematic designator R3)
R3_CO6 "RC0805JR-071KL" RESC2012X60N 3287.97,3916.75 r0 top (schematic designator R3)
R3_CO7 "RC0805JR-071KL" RESC2012X60N 3287.97,4616.75 r0 top (schematic designator R3)
R3_CO8 "RC0805JR-071KL" RESC2012X60N 3287.54,5318.72 r0 top (schematic designator R3)
R4_CO1 "RT0805BRD0724K9L" RESC2012X60N 4030,425.61 r0 top (schematic designator R4)
R4_CO2 "RT0805BRD0724K9L" RESC2012X60N 4030,1125.61 r0 top (schematic designator R4)
R4_CO3 "RT0805BRD0724K9L" RESC2012X60N 4030,1825.61 r0 top (schematic designator R4)
R4_CO4 "RT0805BRD0724K9L" RESC2012X60N 4030,2525.61 r0 top (schematic designator R4)
R4_CO5 "RT0805BRD0724K9L" RESC2012X60N 4030,3225.61 r0 top (schematic designator R4)
R4_CO6 "RT0805BRD0724K9L" RESC2012X60N 4030,3925.61 r0 top (schematic designator R4)
R4_CO7 "RT0805BRD0724K9L" RESC2012X60N 4030,4625.61 r0 top (schematic designator R4)
R4_CO8 "RT0805BRD0724K9L" RESC2012X60N 4029.57,5327.58 r0 top (schematic designator R4)
R5_CO1 "RC0805JR-071KL" RESC2012X60N 3287.97,296.75 r0 top (schematic designator R5)
R5_CO2 "RC0805JR-071KL" RESC2012X60N 3287.97,996.75 r0 top (schematic designator R5)
R5_CO3 "RC0805JR-071KL" RESC2012X60N 3287.97,1696.75 r0 top (schematic designator R5)
R5_CO4 "RC0805JR-071KL" RESC2012X60N 3287.97,2396.75 r0 top (schematic designator R5)
R5_CO5 "RC0805JR-071KL" RESC2012X60N 3287.97,3096.75 r0 top (schematic designator R5)
R5_CO6 "RC0805JR-071KL" RESC2012X60N 3287.97,3796.75 r0 top (schematic designator R5)
R5_CO7 "RC0805JR-071KL" RESC2012X60N 3287.97,4496.75 r0 top (schematic designator R5)
R5_CO8 "RC0805JR-071KL" RESC2012X60N 3287.54,5198.72 r0 top (schematic designator R5)
R6_CO1 "RT0805BRD0724K9L" RESC2012X60N 4045,310.96 r0 top (schematic designator R6)
R6_CO2 "RT0805BRD0724K9L" RESC2012X60N 4045,1010.96 r0 top (schematic designator R6)
R6_CO3 "RT0805BRD0724K9L" RESC2012X60N 4045,1710.96 r0 top (schematic designator R6)
R6_CO4 "RT0805BRD0724K9L" RESC2012X60N 4045,2410.96 r0 top (schematic designator R6)
R6_CO5 "RT0805BRD0724K9L" RESC2012X60N 4045,3110.96 r0 top (schematic designator R6)
R6_CO6 "RT0805BRD0724K9L" RESC2012X60N 4045,3810.96 r0 top (schematic designator R6)
R6_CO7 "RT0805BRD0724K9L" RESC2012X60N 4045,4510.96 r0 top (schematic designator R6)
R6_CO8 "RT0805BRD0724K9L" RESC2012X60N 4044.57,5212.93 r0 top (schematic designator R6)
R7_CO1 "RC0805JR-071KL" RESC2012X60N 3288.57,216 r0 top (schematic designator R7)
R7_CO2 "RC0805JR-071KL" RESC2012X60N 3288.57,916 r0 top (schematic designator R7)
R7_CO3 "RC0805JR-071KL" RESC2012X60N 3288.57,1616 r0 top (schematic designator R7)
R7_CO4 "RC0805JR-071KL" RESC2012X60N 3288.57,2316 r0 top (schematic designator R7)
R7_CO5 "RC0805JR-071KL" RESC2012X60N 3288.57,3016 r0 top (schematic designator R7)
R7_CO6 "RC0805JR-071KL" RESC2012X60N 3288.57,3716 r0 top (schematic designator R7)
R7_CO7 "RC0805JR-071KL" RESC2012X60N 3288.57,4416 r0 top (schematic designator R7)
R7_CO8 "RC0805JR-071KL" RESC2012X60N 3288.14,5117.97 r0 top (schematic designator R7)
R8_CO1 "RT0805BRD0724K9L" RESC2012X60N 4035.43,193.03 r0 top (schematic designator R8)
R8_CO2 "RT0805BRD0724K9L" RESC2012X60N 4035.43,893.03 r0 top (schematic designator R8)
R8_CO3 "RT0805BRD0724K9L" RESC2012X60N 4035.43,1593.03 r0 top (schematic designator R8)
R8_CO4 "RT0805BRD0724K9L" RESC2012X60N 4035.43,2293.03 r0 top (schematic designator R8)
R8_CO5 "RT0805BRD0724K9L" RESC2012X60N 4035.43,2993.03 r0 top (schematic designator R8)
R8_CO6 "RT0805BRD0724K9L" RESC2012X60N 4035.43,3693.03 r0 top (schematic designator R8)
R8_CO7 "RT0805BRD0724K9L" RESC2012X60N 4035.43,4393.03 r0 top (schematic designator R8)
R8_CO8 "RT0805BRD0724K9L" RESC2012X60N 4035,5095 r0 top (schematic designator R8)
R9_CO1 "-" RESC2012X65N 4250,591.26 r0 top (schematic designator R9)
R9_CO2 "-" RESC2012X65N 4250,1291.26 r0 top (schematic designator R9)
R9_CO3 "-" RESC2012X65N 4250,1991.26 r0 top (schematic designator R9)
R9_CO4 "-" RESC2012X65N 4250,2691.26 r0 top (schematic designator R9)
R9_CO5 "-" RESC2012X65N 4250,3391.26 r0 top (schematic designator R9)
R9_CO6 "-" RESC2012X65N 4250,4091.26 r0 top (schematic designator R9)
R9_CO7 "-" RESC2012X65N 4250,4791.26 r0 top (schematic designator R9)
R9_CO8 "-" RESC2012X65N 4249.57,5493.23 r0 top (schematic designator R9)
R10_CO1 "-" RESC2012X65N 4250,465.48 r0 top (schematic designator R10)
R10_CO2 "-" RESC2012X65N 4250,1165.48 r0 top (schematic designator R10)
R10_CO3 "-" RESC2012X65N 4250,1865.48 r0 top (schematic designator R10)
R10_CO4 "-" RESC2012X65N 4250,2565.48 r0 top (schematic designator R10)
R10_CO5 "-" RESC2012X65N 4250,3265.48 r0 top (schematic designator R10)
R10_CO6 "-" RESC2012X65N 4250,3965.48 r0 top (schematic designator R10)
R10_CO7 "-" RESC2012X65N 4250,4665.48 r0 top (schematic designator R10)
R10_CO8 "-" RESC2012X65N 4249.57,5367.45 r0 top (schematic designator R10)
R11_CO1 "-" RESC2012X65N 4250,155 r180 top (schematic designator R11)
R11_CO2 "-" RESC2012X65N 4250,855 r180 top (schematic designator R11)
R11_CO3 "-" RESC2012X65N 4250,1555 r180 top (schematic designator R11)
R11_CO4 "-" RESC2012X65N 4250,2255 r180 top (schematic designator R11)
R11_CO5 "-" RESC2012X65N 4250,2955 r180 top (schematic designator R11)
R11_CO6 "-" RESC2012X65N 4250,3655 r180 top (schematic designator R11)
R11_CO7 "-" RESC2012X65N 4250,4355 r180 top (schematic designator R11)
R11_CO8 "-" RESC2012X65N 4249.57,5056.97 r180 top (schematic designator R11)
R12_CO1 "-" RESC2012X65N 4255.43,290 r180 top (schematic designator R12)
R12_CO2 "-" RESC2012X65N 4255.43,990 r180 top (schematic designator R12)
R12_CO3 "-" RESC2012X65N 4255.43,1690 r180 top (schematic designator R12)
R12_CO4 "-" RESC2012X65N 4255.43,2390 r180 top (schematic designator R12)
R12_CO5 "-" RESC2012X65N 4255.43,3090 r180 top (schematic designator R12)
R12_CO6 "-" RESC2012X65N 4255.43,3790 r180 top (schematic designator R12)
R12_CO7 "-" RESC2012X65N 4255.43,4490 r180 top (schematic designator R12)
R12_CO8 "-" RESC2012X65N 4255,5191.97 r180 top (schematic designator R12)
R13_CO1 "RC0805JR-071KL" RESC2012X60N 2065,525 r0 top (schematic designator R13)
R13_CO2 "RC0805JR-071KL" RESC2012X60N 2065,1225 r0 top (schematic designator R13)
R13_CO3 "RC0805JR-071KL" RESC2012X60N 2065,1925 r0 top (schematic designator R13)
R13_CO4 "RC0805JR-071KL" RESC2012X60N 2065,2625 r0 top (schematic designator R13)
R13_CO5 "RC0805JR-071KL" RESC2012X60N 2065,3325 r0 top (schematic designator R13)
R13_CO6 "RC0805JR-071KL" RESC2012X60N 2065,4025 r0 top (schematic designator R13)
R13_CO7 "RC0805JR-071KL" RESC2012X60N 2065,4725 r0 top (schematic designator R13)
R13_CO8 "RC0805JR-071KL" RESC2012X60N 2064.57,5426.97 r0 top (schematic designator R13)
R14_CO1 "RC0805JR-071KL" RESC2012X60N 2065,250 r180 top (schematic designator R14)
R14_CO2 "RC0805JR-071KL" RESC2012X60N 2065,950 r180 top (schematic designator R14)
R14_CO3 "RC0805JR-071KL" RESC2012X60N 2065,1650 r180 top (schematic designator R14)
R14_CO4 "RC0805JR-071KL" RESC2012X60N 2065,2350 r180 top (schematic designator R14)
R14_CO5 "RC0805JR-071KL" RESC2012X60N 2065,3050 r180 top (schematic designator R14)
R14_CO6 "RC0805JR-071KL" RESC2012X60N 2065,3750 r180 top (schematic designator R14)
R14_CO7 "RC0805JR-071KL" RESC2012X60N 2065,4450 r180 top (schematic designator R14)
R14_CO8 "RC0805JR-071KL" RESC2012X60N 2064.57,5151.97 r180 top (schematic designator R14)
R15_CO1 "RC0805JR-071KL" RESC2012X60N 2625,240 r0 top (schematic designator R15)
R15_CO2 "RC0805JR-071KL" RESC2012X60N 2625,940 r0 top (schematic designator R15)
R15_CO3 "RC0805JR-071KL" RESC2012X60N 2625,1640 r0 top (schematic designator R15)
R15_CO4 "RC0805JR-071KL" RESC2012X60N 2625,2340 r0 top (schematic designator R15)
R15_CO5 "RC0805JR-071KL" RESC2012X60N 2625,3040 r0 top (schematic designator R15)
R15_CO6 "RC0805JR-071KL" RESC2012X60N 2625,3740 r0 top (schematic designator R15)
R15_CO7 "RC0805JR-071KL" RESC2012X60N 2625,4440 r0 top (schematic designator R15)
R15_CO8 "RC0805JR-071KL" RESC2012X60N 2624.57,5141.97 r0 top (schematic designator R15)
R16_CO1 "RC0805JR-071KL" RESC2012X60N 2625,520 r180 top (schematic designator R16)
R16_CO2 "RC0805JR-071KL" RESC2012X60N 2625,1220 r180 top (schematic designator R16)
R16_CO3 "RC0805JR-071KL" RESC2012X60N 2625,1920 r180 top (schematic designator R16)
R16_CO4 "RC0805JR-071KL" RESC2012X60N 2625,2620 r180 top (schematic designator R16)
R16_CO5 "RC0805JR-071KL" RESC2012X60N 2625,3320 r180 top (schematic designator R16)
R16_CO6 "RC0805JR-071KL" RESC2012X60N 2625,4020 r180 top (schematic designator R16)
R16_CO7 "RC0805JR-071KL" RESC2012X60N 2625,4720 r180 top (schematic designator R16)
R16_CO8 "RC0805JR-071KL" RESC2012X60N 2624.57,5421.97 r180 top (schematic designator R16)
R17_CO1 "RC0805FR-074K7L" RESC2012X60N 2065,605 r180 top (schematic designator R17)
R17_CO2 "RC0805FR-074K7L" RESC2012X60N 2065,1305 r180 top (schematic designator R17)
R17_CO3 "RC0805FR-074K7L" RESC2012X60N 2065,2005 r180 top (schematic designator R17)
R17_CO4 "RC0805FR-074K7L" RESC2012X60N 2065,2705 r180 top (schematic designator R17)
R17_CO5 "RC0805FR-074K7L" RESC2012X60N 2065,3405 r180 top (schematic designator R17)
R17_CO6 "RC0805FR-074K7L" RESC2012X60N 2065,4105 r180 top (schematic designator R17)
R17_CO7 "RC0805FR-074K7L" RESC2012X60N 2065,4805 r180 top (schematic designator R17)
R17_CO8 "RC0805FR-074K7L" RESC2012X60N 2064.57,5506.97 r180 top (schematic designator R17)
R18_CO1 "RC0805FR-074K7L" RESC2012X60N 2065,161 r0 top (schematic designator R18)
R18_CO2 "RC0805FR-074K7L" RESC2012X60N 2065,861 r0 top (schematic designator R18)
R18_CO3 "RC0805FR-074K7L" RESC2012X60N 2065,1561 r0 top (schematic designator R18)
R18_CO4 "RC0805FR-074K7L" RESC2012X60N 2065,2261 r0 top (schematic designator R18)
R18_CO5 "RC0805FR-074K7L" RESC2012X60N 2065,2961 r0 top (schematic designator R18)
R18_CO6 "RC0805FR-074K7L" RESC2012X60N 2065,3661 r0 top (schematic designator R18)
R18_CO7 "RC0805FR-074K7L" RESC2012X60N 2065,4361 r0 top (schematic designator R18)
R18_CO8 "RC0805FR-074K7L" RESC2012X60N 2064.57,5062.97 r0 top (schematic designator R18)
R19_CO1 "RC0805FR-074K7L" RESC2012X60N 2625,150 r0 top (schematic designator R19)
R19_CO2 "RC0805FR-074K7L" RESC2012X60N 2625,850 r0 top (schematic designator R19)
R19_CO3 "RC0805FR-074K7L" RESC2012X60N 2625,1550 r0 top (schematic designator R19)
R19_CO4 "RC0805FR-074K7L" RESC2012X60N 2625,2250 r0 top (schematic designator R19)
R19_CO5 "RC0805FR-074K7L" RESC2012X60N 2625,2950 r0 top (schematic designator R19)
R19_CO6 "RC0805FR-074K7L" RESC2012X60N 2625,3650 r0 top (schematic designator R19)
R19_CO7 "RC0805FR-074K7L" RESC2012X60N 2625,4350 r0 top (schematic designator R19)
R19_CO8 "RC0805FR-074K7L" RESC2012X60N 2624.57,5051.97 r0 top (schematic designator R19)
R20_CO1 "RC0805FR-074K7L" RESC2012X60N 2625,605 r0 top (schematic designator R20)
R20_CO2 "RC0805FR-074K7L" RESC2012X60N 2625,1305 r0 top (schematic designator R20)
R20_CO3 "RC0805FR-074K7L" RESC2012X60N 2625,2005 r0 top (schematic designator R20)
R20_CO4 "RC0805FR-074K7L" RESC2012X60N 2625,2705 r0 top (schematic designator R20)
R20_CO5 "RC0805FR-074K7L" RESC2012X60N 2625,3405 r0 top (schematic designator R20)
R20_CO6 "RC0805FR-074K7L" RESC2012X60N 2625,4105 r0 top (schematic designator R20)
R20_CO7 "RC0805FR-074K7L" RESC2012X60N 2625,4805 r0 top (schematic designator R20)
R20_CO8 "RC0805FR-074K7L" RESC2012X60N 2624.57,5506.97 r0 top (schematic designator R20)
R21_CO1 "-" RESC2012X65N 4450,564.51 r90 top (schematic designator R21)
R21_CO2 "-" RESC2012X65N 4450,1264.51 r90 top (schematic designator R21)
R21_CO3 "-" RESC2012X65N 4450,1964.51 r90 top (schematic designator R21)
R21_CO4 "-" RESC2012X65N 4450,2664.51 r90 top (schematic designator R21)
R21_CO5 "-" RESC2012X65N 4450,3364.51 r90 top (schematic designator R21)
R21_CO6 "-" RESC2012X65N 4450,4064.51 r90 top (schematic designator R21)
R21_CO7 "-" RESC2012X65N 4450,4764.51 r90 top (schematic designator R21)
R21_CO8 "-" RESC2012X65N 4449.57,5466.48 r90 top (schematic designator R21)
R22_CO1 "CRG0805F56R" RESC2012X65N 4450,419.75 r270 top (schematic designator R22)
R22_CO2 "CRG0805F56R" RESC2012X65N 4450,1119.75 r270 top (schematic designator R22)
R22_CO3 "CRG0805F56R" RESC2012X65N 4450,1819.75 r270 top (schematic designator R22)
R22_CO4 "CRG0805F56R" RESC2012X65N 4450,2519.75 r270 top (schematic designator R22)
R22_CO5 "CRG0805F56R" RESC2012X65N 4450,3219.75 r270 top (schematic designator R22)
R22_CO6 "CRG0805F56R" RESC2012X65N 4450,3919.75 r270 top (schematic designator R22)
R22_CO7 "CRG0805F56R" RESC2012X65N 4450,4619.75 r270 top (schematic designator R22)
R22_CO8 "CRG0805F56R" RESC2012X65N 4449.57,5321.72 r270 top (schematic designator R22)
R23_CO1 "-" RESC2012X65N 4450,127.4 r90 top (schematic designator R23)
R23_CO2 "-" RESC2012X65N 4450,827.4 r90 top (schematic designator R23)
R23_CO3 "-" RESC2012X65N 4450,1527.4 r90 top (schematic designator R23)
R23_CO4 "-" RESC2012X65N 4450,2227.4 r90 top (schematic designator R23)
R23_CO5 "-" RESC2012X65N 4450,2927.4 r90 top (schematic designator R23)
R23_CO6 "-" RESC2012X65N 4450,3627.4 r90 top (schematic designator R23)
R23_CO7 "-" RESC2012X65N 4450,4327.4 r90 top (schematic designator R23)
R23_CO8 "-" RESC2012X65N 4449.57,5029.37 r90 top (schematic designator R23)
R24_CO1 "-" RESC2012X65N 4450,275.24 r270 top (schematic designator R24)
R24_CO2 "-" RESC2012X65N 4450,975.24 r270 top (schematic designator R24)
R24_CO3 "-" RESC2012X65N 4450,1675.24 r270 top (schematic designator R24)
R24_CO4 "-" RESC2012X65N 4450,2375.24 r270 top (schematic designator R24)
R24_CO5 "-" RESC2012X65N 4450,3075.24 r270 top (schematic designator R24)
R24_CO6 "-" RESC2012X65N 4450,3775.24 r270 top (schematic designator R24)
R24_CO7 "-" RESC2012X65N 4450,4475.24 r270 top (schematic designator R24)
R24_CO8 "-" RESC2012X65N 4449.57,5177.21 r270 top (schematic designator R24)
VR1 "PV36W104C01B00" PV36W 1276.1,4594.23 r0 top

## Footprints (in the part's own frame and the unit in brackets; to place one, negate y for a bottom-side part, rotate by r counter-clockwise, add the part's x,y. Pads: shape width x height; smd on the part's side, far side on the other; paste and mask are expansions set on the pad)
CAPC2013X70N [mil]
  rect 36x57 smd: 1(-32,0) 2(32,0)
HDR1X2 [mm] "Connector; Header; 2 Position"
  rect 1.5x1.5 hole 0.9: 1(0,0)
  round 1.5 hole 0.9: 2(2.54,0)
  silkscreen extent -1.27,-1.27 3.81,1.27
HDR1X3 [mm] "Connector; Header; 3 Position"
  rect 1.5x1.5 hole 0.9: 1(0,0)
  round 1.5 hole 0.9: 2(2.54,0) 3(5.08,0)
  silkscreen extent -1.27,-1.27 6.35,1.27
HDR1X14 [mm] "Connector; Header; 14 Position"
  rect 1.5x1.5 hole 0.9: 1(0,0)
  round 1.5 hole 0.9: 2(2.54,0) 3(5.08,0) 4(7.62,0) 5(10.16,0) 6(12.7,0) 7(15.24,0) 8(17.78,0) 9(20.32,0) 10(22.86,0) 11(25.4,0) 12(27.94,0) 13(30.48,0) 14(33.02,0)
  silkscreen extent -1.27,-1.27 34.29,1.27
HDR2X4 [mm] "Connector; Header; 4x2 Position"
  rect 1.5x1.5 hole 0.9: 1(0,0)
  round 1.5 hole 0.9: 2(0,2.54) 3(2.54,0) 4(2.54,2.54) 5(5.08,0) 6(5.08,2.54) 7(7.62,0) 8(7.62,2.54)
  silkscreen extent -1.27,-1.27 8.89,3.81
PV36W [mm]
  round 1.2 hole 0.74: 1(-2.441,-2.54) 2(-2.441,0) 3(-2.441,2.54)
  silkscreen extent -4.83,-4.32 0.81,4.57
RESC2012X60N [mm]
  rect 0.95x1.4 smd: 1(-1,0) 2(1,0)
  silkscreen extent 0,-0.53 0,0.53, body extent -1,-0.63 1,0.63, height 0.6
RESC2012X65N [mm]
  rect 1x1.45 smd: 1(-0.95,0) 2(0.95,0)
  silkscreen extent 0,-0.53 0,0.53, body extent -1,-0.63 1,0.63, height 0.65
SOIC127P600X175-16N [mm]
  rect 1.55x0.7 smd: 1(-2.725,4.445) 2(-2.725,3.175) 3(-2.725,1.905) 4(-2.725,0.635) 5(-2.725,-0.635) 6(-2.725,-1.905) 7(-2.725,-3.175) 8(-2.725,-4.445) 9(2.725,-4.445) 10(2.725,-3.175) 11(2.725,-1.905) 12(2.725,-0.635) 13(2.725,0.635) 14(2.725,1.905) 15(2.725,3.175) 16(2.725,4.445)
  silkscreen extent -3.5,-4.95 1.6,5.15, body extent -3,-4.95 3,4.95, height 1.75
SOP65P640X110-24N [mm]
  rect 1.475x0.45 smd: 1(-2.938,3.575) 2(-2.938,2.925) 3(-2.938,2.275) 4(-2.938,1.625) 5(-2.938,0.975) 6(-2.938,0.325) 7(-2.938,-0.325) 8(-2.938,-0.975) 9(-2.938,-1.625) 10(-2.938,-2.275) 11(-2.938,-2.925) 12(-2.938,-3.575) 13(2.938,-3.575) 14(2.938,-2.925) 15(2.938,-2.275) 16(2.938,-1.625) 17(2.938,-0.975) 18(2.938,-0.325) 19(2.938,0.325) 20(2.938,0.975) 21(2.938,1.625) 22(2.938,2.275) 23(2.938,2.925) 24(2.938,3.575)
  silkscreen extent -3.67,-3.9 1.85,4.15, body extent -3.2,-3.9 3.2,3.9, height 1.1
SOP65P640X120-14N [mm]
  rect 1.475x0.45 smd: 1(-2.938,1.95) 2(-2.938,1.3) 3(-2.938,0.65) 4(-2.938,0) 5(-2.938,-0.65) 6(-2.938,-1.3) 7(-2.938,-1.95) 8(2.938,-1.95) 9(2.938,-1.3) 10(2.938,-0.65) 11(2.938,0) 12(2.938,0.65) 13(2.938,1.3) 14(2.938,1.95)
  silkscreen extent -3.67,-2.5 1.85,2.52, body extent -3.2,-2.5 3.2,2.5, height 1.2

## Part data
C1_CO1 C1_CO2 C1_CO3 C1_CO4 C1_CO5 C1_CO6 C1_CO7 C1_CO8 C2_CO1 C2_CO2 C2_CO3 C2_CO4 C2_CO5 C2_CO6 C2_CO7 C2_CO8 C3_CO1 C3_CO2 C3_CO3 C3_CO4 C3_CO5 C3_CO6 C3_CO7 C3_CO8 C4_CO1 C4_CO2 C4_CO3 C4_CO4 C4_CO5 C4_CO6 C4_CO7 C4_CO8 C5_CO1 C5_CO2 C5_CO3 C5_CO4 C5_CO5 C5_CO6 C5_CO7 C5_CO8 C6_CO1 C6_CO2 C6_CO3 C6_CO4 C6_CO5 C6_CO6 C6_CO7 C6_CO8 C7_CO1 C7_CO2 C7_CO3 C7_CO4 C7_CO5 C7_CO6 C7_CO7 C7_CO8: "Capacitor", Manufacturer_Name="YAGEO (PHYCOMP)", Mouser Part Number=603-CC805ZRY5V9BB104, Datasheet Link=http://componentsearchengine.com/Datasheets/1/CC0805ZRY5V9BB104.pdf, Manufacturer_Part_Number=CC0805ZRY5V9BB104, Mouser Price/Stock=https://www.mouser.com/Search/Refine.aspx?Keyword=603-CC805ZRY5V9BB104
C8_CO1 C8_CO2 C8_CO3 C8_CO4 C8_CO5 C8_CO6 C8_CO7 C8_CO8: library part CC0805ZRY5V9BB104, "Capacitor", Manufacturer_Name="YAGEO (PHYCOMP)", Mouser Part Number=603-CC805ZRY5V9BB104, Datasheet Link=http://componentsearchengine.com/Datasheets/1/CC0805ZRY5V9BB104.pdf, Manufacturer_Part_Number=CC0805ZRY5V9BB104, Mouser Price/Stock=https://www.mouser.com/Search/Refine.aspx?Keyword=603-CC805ZRY5V9BB104
IC1_CO1 IC1_CO2 IC1_CO3 IC1_CO4 IC1_CO5 IC1_CO6 IC1_CO7 IC1_CO8: "Integrated Circuit", Manufacturer_Name="Maxim Integrated", Mouser Part Number=700-MAX9602EUG, Datasheet Link=https://componentsearchengine.com/Datasheets/1/MAX9602EUG+.pdf, Height=1.1mm, Manufacturer_Part_Number=MAX9602EUG+, Mouser Price/Stock=https://www.mouser.com/Search/Refine.aspx?Keyword=700-MAX9602EUG
IC2_CO1 IC2_CO2 IC2_CO3 IC2_CO4 IC2_CO5 IC2_CO6 IC2_CO7 IC2_CO8: "Integrated Circuit", Manufacturer_Name="Texas Instruments", Mouser Part Number=595-OPA4727AIPWRG4, Datasheet Link=http://www.ti.com/lit/ds/symlink/opa727.pdf, Height=1.2mm, Manufacturer_Part_Number=OPA4727AIPWRG4, Mouser Price/Stock=https://www.mouser.com/Search/Refine.aspx?Keyword=595-OPA4727AIPWRG4
IC3_CO1 IC3_CO2 IC3_CO3 IC3_CO4 IC3_CO5 IC3_CO6 IC3_CO7 IC3_CO8: "Integrated Circuit", Manufacturer_Name="Texas Instruments", Mouser Part Number=595-CD4043BDR, Datasheet Link=http://www.ti.com/lit/ds/symlink/cd4043b.pdf, Height=1.75mm, Manufacturer_Part_Number=CD4043BDR, Mouser Price/Stock=https://www.mouser.com/Search/Refine.aspx?Keyword=595-CD4043BDR
IC4_CO1 IC4_CO2 IC4_CO3 IC4_CO4 IC4_CO5 IC4_CO6 IC4_CO7 IC4_CO8: "Integrated Circuit", Manufacturer_Name="Analog Devices", Mouser Part Number=584-ADG3304BRUZ-R7, Datasheet Link=http://componentsearchengine.com/Datasheets/1/ADG3304BRUZ-REEL7.pdf, Height=1.2mm, Manufacturer_Part_Number=ADG3304BRUZ-REEL7, Mouser Price/Stock=https://www.mouser.com/Search/Refine.aspx?Keyword=584-ADG3304BRUZ-R7
P1 P2 P3 P4: "Header, 14-Pin", LatestRevisionDate=17-Jul-2002, LatestRevisionNote="Re-released for DXP Platform.", Publisher="Altium Limited"
P1_CO1 P1_CO2 P1_CO3 P1_CO4 P1_CO5 P1_CO6 P1_CO7 P1_CO8: "Header, 4-Pin, Dual row", LatestRevisionDate=17-Jul-2002, LatestRevisionNote="Re-released for DXP Platform.", Publisher="Altium Limited"
P_T: "Header, 2-Pin", LatestRevisionDate=17-Jul-2002, LatestRevisionNote="Re-released for DXP Platform.", Publisher="Altium Limited"
Power: "Header, 3-Pin", LatestRevisionDate=17-Jul-2002, LatestRevisionNote="Re-released for DXP Platform.", Publisher="Altium Limited"
R1_CO1 R1_CO2 R1_CO3 R1_CO4 R1_CO5 R1_CO6 R1_CO7 R1_CO8 R3_CO1 R3_CO2 R3_CO3 R3_CO4 R3_CO5 R3_CO6 R3_CO7 R3_CO8 R5_CO1 R5_CO2 R5_CO3 R5_CO4 R5_CO5 R5_CO6 R5_CO7 R5_CO8 R7_CO1 R7_CO2 R7_CO3 R7_CO4 R7_CO5 R7_CO6 R7_CO7 R7_CO8 R13_CO1 R13_CO2 R13_CO3 R13_CO4 R13_CO5 R13_CO6 R13_CO7 R13_CO8 R14_CO1 R14_CO2 R14_CO3 R14_CO4 R14_CO5 R14_CO6 R14_CO7 R14_CO8 R15_CO1 R15_CO2 R15_CO3 R15_CO4 R15_CO5 R15_CO6 R15_CO7 R15_CO8 R16_CO1 R16_CO2 R16_CO3 R16_CO4 R16_CO5 R16_CO6 R16_CO7 R16_CO8: "Resistor", Manufacturer_Name="YAGEO (PHYCOMP)", Mouser Part Number=603-RC0805JR-071KL, Datasheet Link=http://www.yageo.com/documents/recent/PYu-RC_Group_51_RoHS_L_10.pdf, Height=0.6mm, Manufacturer_Part_Number=RC0805JR-071KL, Mouser Price/Stock=https://www.mouser.com/Search/Refine.aspx?Keyword=603-RC0805JR-071KL
R2_CO1 R2_CO2 R2_CO3 R2_CO4 R2_CO5 R2_CO6 R2_CO7 R2_CO8 R4_CO1 R4_CO2 R4_CO3 R4_CO4 R4_CO5 R4_CO6 R4_CO7 R4_CO8 R6_CO1 R6_CO2 R6_CO3 R6_CO4 R6_CO5 R6_CO6 R6_CO7 R6_CO8 R8_CO1 R8_CO2 R8_CO3 R8_CO4 R8_CO5 R8_CO6 R8_CO7 R8_CO8: "Resistor", Manufacturer_Name="YAGEO (PHYCOMP)", Datasheet Link=http://www.yageo.com/documents/recent/PYu-RT_1-to-0.01_RoHS_L_9.pdf, Height=0.6mm, Manufacturer_Part_Number=RT0805BRD0724K9L
R9_CO1 R9_CO2 R9_CO3 R9_CO4 R9_CO5 R9_CO6 R9_CO7 R9_CO8 R10_CO1 R10_CO2 R10_CO3 R10_CO4 R10_CO5 R10_CO6 R10_CO7 R10_CO8 R11_CO1 R11_CO2 R11_CO3 R11_CO4 R11_CO5 R11_CO6 R11_CO7 R11_CO8 R12_CO1 R12_CO2 R12_CO3 R12_CO4 R12_CO5 R12_CO6 R12_CO7 R12_CO8 R21_CO1 R21_CO2 R21_CO3 R21_CO4 R21_CO5 R21_CO6 R21_CO7 R21_CO8 R23_CO1 R23_CO2 R23_CO3 R23_CO4 R23_CO5 R23_CO6 R23_CO7 R23_CO8 R24_CO1 R24_CO2 R24_CO3 R24_CO4 R24_CO5 R24_CO6 R24_CO7 R24_CO8: library part CRG0805F56R, "Resistor", Manufacturer_Name="TE Connectivity", RS Part Number=2230269, Allied_Number=70063224, Allied Price/Stock=https://www.alliedelec.com/te-connectivity-crg0805f56r/70063224/, Datasheet Link=http://www.te.com/commerce/DocumentDelivery/DDEController?Action=showdoc&DocId=Customer+Drawing%7F1623109%7FBA%7Fpdf%7FEnglish%7FENG_CD_1623109_BA.pdf%7F1623109-1, Height=0.65mm, Manufacturer_Part_Number=CRG0805F56R, RS Price/Stock=https://uk.rs-online.com/web/p/products/2230269
R17_CO1 R17_CO2 R17_CO3 R17_CO4 R17_CO5 R17_CO6 R17_CO7 R17_CO8 R18_CO1 R18_CO2 R18_CO3 R18_CO4 R18_CO5 R18_CO6 R18_CO7 R18_CO8 R19_CO1 R19_CO2 R19_CO3 R19_CO4 R19_CO5 R19_CO6 R19_CO7 R19_CO8 R20_CO1 R20_CO2 R20_CO3 R20_CO4 R20_CO5 R20_CO6 R20_CO7 R20_CO8: "Resistor", Manufacturer_Name="YAGEO (PHYCOMP)", Mouser Part Number=603-RC0805FR-074K7L, RS Part Number=6181408, Datasheet Link=http://www.yageo.com/documents/recent/PYu-RC_Group_51_RoHS_L_10.pdf, Height=0.6mm, Manufacturer_Part_Number=RC0805FR-074K7L, Mouser Price/Stock=https://www.mouser.com/Search/Refine.aspx?Keyword=603-RC0805FR-074K7L, RS Price/Stock=http://uk.rs-online.com/web/p/products/6181408
R22_CO1 R22_CO2 R22_CO3 R22_CO4 R22_CO5 R22_CO6 R22_CO7 R22_CO8: "Resistor", Manufacturer_Name="TE Connectivity", RS Part Number=2230269, Allied_Number=70063224, Allied Price/Stock=https://www.alliedelec.com/te-connectivity-crg0805f56r/70063224/, Datasheet Link=http://www.te.com/commerce/DocumentDelivery/DDEController?Action=showdoc&DocId=Customer+Drawing%7F1623109%7FBA%7Fpdf%7FEnglish%7FENG_CD_1623109_BA.pdf%7F1623109-1, Height=0.65mm, Manufacturer_Part_Number=CRG0805F56R, RS Price/Stock=https://uk.rs-online.com/web/p/products/2230269
VR1: "Variable Resistor", Manufacturer_Name=Bourns, Mouser Part Number=81-PV36W104C01B00, RS Part Number=7692160P, Allied_Number=71024705, Allied Price/Stock=https://www.alliedelec.com/bourns-pv36w104c01b00/71024705/, Datasheet Link=https://www.bourns.com/docs/Product-Datasheets/pv36.pdf, Manufacturer_Part_Number=PV36W104C01B00, Mouser Price/Stock=https://www.mouser.com/Search/Refine.aspx?Keyword=81-PV36W104C01B00, RS Price/Stock=http://uk.rs-online.com/web/p/products/7692160P

## Via types
v1: diameter 50, hole 28, Top Layer to Bottom Layer, 312 vias

## Nets (pads, with @x,y where several pads share a name; then routed paths per layer and width w, separated by ;. In a path a pad name is that pad's centre, name@x,y a point inside that pad or via, vN(x,y) a via of type N, cw(c..) or ccw(c..) an arc to the next point about the centre after c; other vN are vias at no path point)
3.3: C7_CO1.1 C7_CO2.1 C7_CO3.1 C7_CO4.1 C7_CO5.1 C7_CO6.1 C7_CO7.1 C7_CO8.1 IC4_CO1.1 IC4_CO2.1 IC4_CO3.1 IC4_CO4.1 IC4_CO5.1 IC4_CO6.1 IC4_CO7.1 IC4_CO8.1 P1.3 P3.3 | length 8212.3
  Top Layer w10: C7_CO7.1@5435.67,4723.2 IC4_CO8.1@5435.67,5118.23 5395.59,5118.23 5370,5143.82 5370,5367.4 C7_CO8.1@5435.67,5433.07 ; IC4_CO1.1@5436.1,216.26 5396.02,216.26 5370.43,241.85 5370.43,465.43 C7_CO1.1@5436.1,531.1 ; IC4_CO2.1@5436.1,916.26 5396.02,916.26 5370.43,941.85 5370.43,1165.43 5436.1,1231.1 IC4_CO3.1@5436.1,1616.26 5396.02,1616.26 5370.43,1641.85 5370.43,1865.43 C7_CO3.1@5436.1,1931.1 ; IC4_CO4.1@5436.1,2316.26 5396.02,2316.26 5370.43,2341.85 5370.43,2565.43 5436.1,2631.1 IC4_CO5.1@5436.1,3016.26 5396.02,3016.26 5370.43,3041.85 5370.43,3265.43 5436.1,3331.1 IC4_CO6.1@5436.1,3716.26 5396.02,3716.26 5370.43,3741.85 5370.43,3965.43 C7_CO6.1@5436.1,4031.1 ; IC4_CO7.1@5436.1,4416.26 5396.02,4416.26 5370.43,4441.85 5370.43,4665.43 C7_CO7.1@5436.1,4731.1 ; C7_CO1.1@5440.43,531.1 IC4_CO2.1@5440.43,912.4 ; C7_CO3.1@5440.43,1931.1 IC4_CO4.1@5440.43,2312.4 ; C7_CO6.1@5440.43,4020 IC4_CO7.1@5440.43,4412.4 ; C7_CO2.1@5450,1227.03 5460.5,1227.03 5482,1205.53 5482,1195.03 6463.28,1195.03 P1.3@6945,1676.75 ; C7_CO7.1@5469.79,4730 5793.57,4730 P3.3@6025,4498.57
5VA_CO1: IC3_CO1.2 IC4_CO1.13 | length 988.8
  Top Layer w10: IC3_CO1.2@4687.59,455 4732.4,455 4825.43,548.03 5035.43,548.03 5060.43,523.03 5060.43,158.89 5066.29,153.03 5113.46,153.03 5160.43,200 5160.43,233.03 5167.45,240.05 5202.97,240.05 IC4_CO1.13@5204.76,241.85
5VA_CO2: IC3_CO2.2 IC4_CO2.13 | length 988.8
  Top Layer w10: IC3_CO2.2@4687.59,1155 4732.4,1155 4825.43,1248.03 5035.43,1248.03 5060.43,1223.03 5060.43,858.89 5066.29,853.03 5113.46,853.03 5160.43,900 5160.43,933.03 5167.45,940.05 5202.97,940.05 IC4_CO2.13@5204.76,941.85
5VA_CO3: IC3_CO3.2 IC4_CO3.13 | length 988.8
  Top Layer w10: IC3_CO3.2@4687.59,1855 4732.4,1855 4825.43,1948.03 5035.43,1948.03 5060.43,1923.03 5060.43,1558.89 5066.29,1553.03 5113.46,1553.03 5160.43,1600 5160.43,1633.03 5167.45,1640.05 5202.97,1640.05 IC4_CO3.13@5204.76,1641.85
5VA_CO4: IC3_CO4.2 IC4_CO4.13 | length 988.8
  Top Layer w10: IC3_CO4.2@4687.59,2555 4732.4,2555 4825.43,2648.03 5035.43,2648.03 5060.43,2623.03 5060.43,2258.89 5066.29,2253.03 5113.46,2253.03 5160.43,2300 5160.43,2333.03 5167.45,2340.05 5202.97,2340.05 IC4_CO4.13@5204.76,2341.85
5VA_CO5: IC3_CO5.2 IC4_CO5.13 | length 988.8
  Top Layer w10: IC3_CO5.2@4687.59,3255 4732.4,3255 4825.43,3348.03 5035.43,3348.03 5060.43,3323.03 5060.43,2958.89 5066.29,2953.03 5113.46,2953.03 5160.43,3000 5160.43,3033.03 5167.45,3040.05 5202.97,3040.05 IC4_CO5.13@5204.76,3041.85
5VA_CO6: IC3_CO6.2 IC4_CO6.13 | length 988.8
  Top Layer w10: IC3_CO6.2@4687.59,3955 4732.4,3955 4825.43,4048.03 5035.43,4048.03 5060.43,4023.03 5060.43,3658.89 5066.29,3653.03 5113.46,3653.03 5160.43,3700 5160.43,3733.03 5167.45,3740.05 5202.97,3740.05 IC4_CO6.13@5204.76,3741.85
5VA_CO7: IC3_CO7.2 IC4_CO7.13 | length 988.8
  Top Layer w10: IC3_CO7.2@4687.59,4655 4732.4,4655 4825.43,4748.03 5035.43,4748.03 5060.43,4723.03 5060.43,4358.89 5066.29,4353.03 5113.46,4353.03 5160.43,4400 5160.43,4433.03 5167.45,4440.05 5202.97,4440.05 IC4_CO7.13@5204.76,4441.85
5VA_CO8: IC3_CO8.2 IC4_CO8.13 | length 988.8
  Top Layer w10: IC3_CO8.2@4687.16,5356.97 4731.97,5356.97 4825,5450 5035,5450 5060,5425 5060,5060.86 5065.86,5055 5113.03,5055 5160,5101.97 5160,5135 5167.02,5142.02 5202.53,5142.02 IC4_CO8.13@5204.33,5143.82
5VB_CO1: IC3_CO1.9 IC4_CO1.12 | length 350.3
  Top Layer w10: IC3_CO1.9@4902.16,155 4961.58,155 4969.61,163.03 v1(4980.43,163.03) ; v1(5110.43,213.03) 5110.43,215 5162.87,267.44 IC4_CO1.12@5204.76,267.44
  Bottom Layer w10: v1(4980.43,163.03) 5060.43,163.03 v1(5110.43,213.03)